# EAGLE board SparkFun_Pressure_Sensor_BMP581_Qwiic-Panel (EAGLE 9.6.2), part 1 of 3
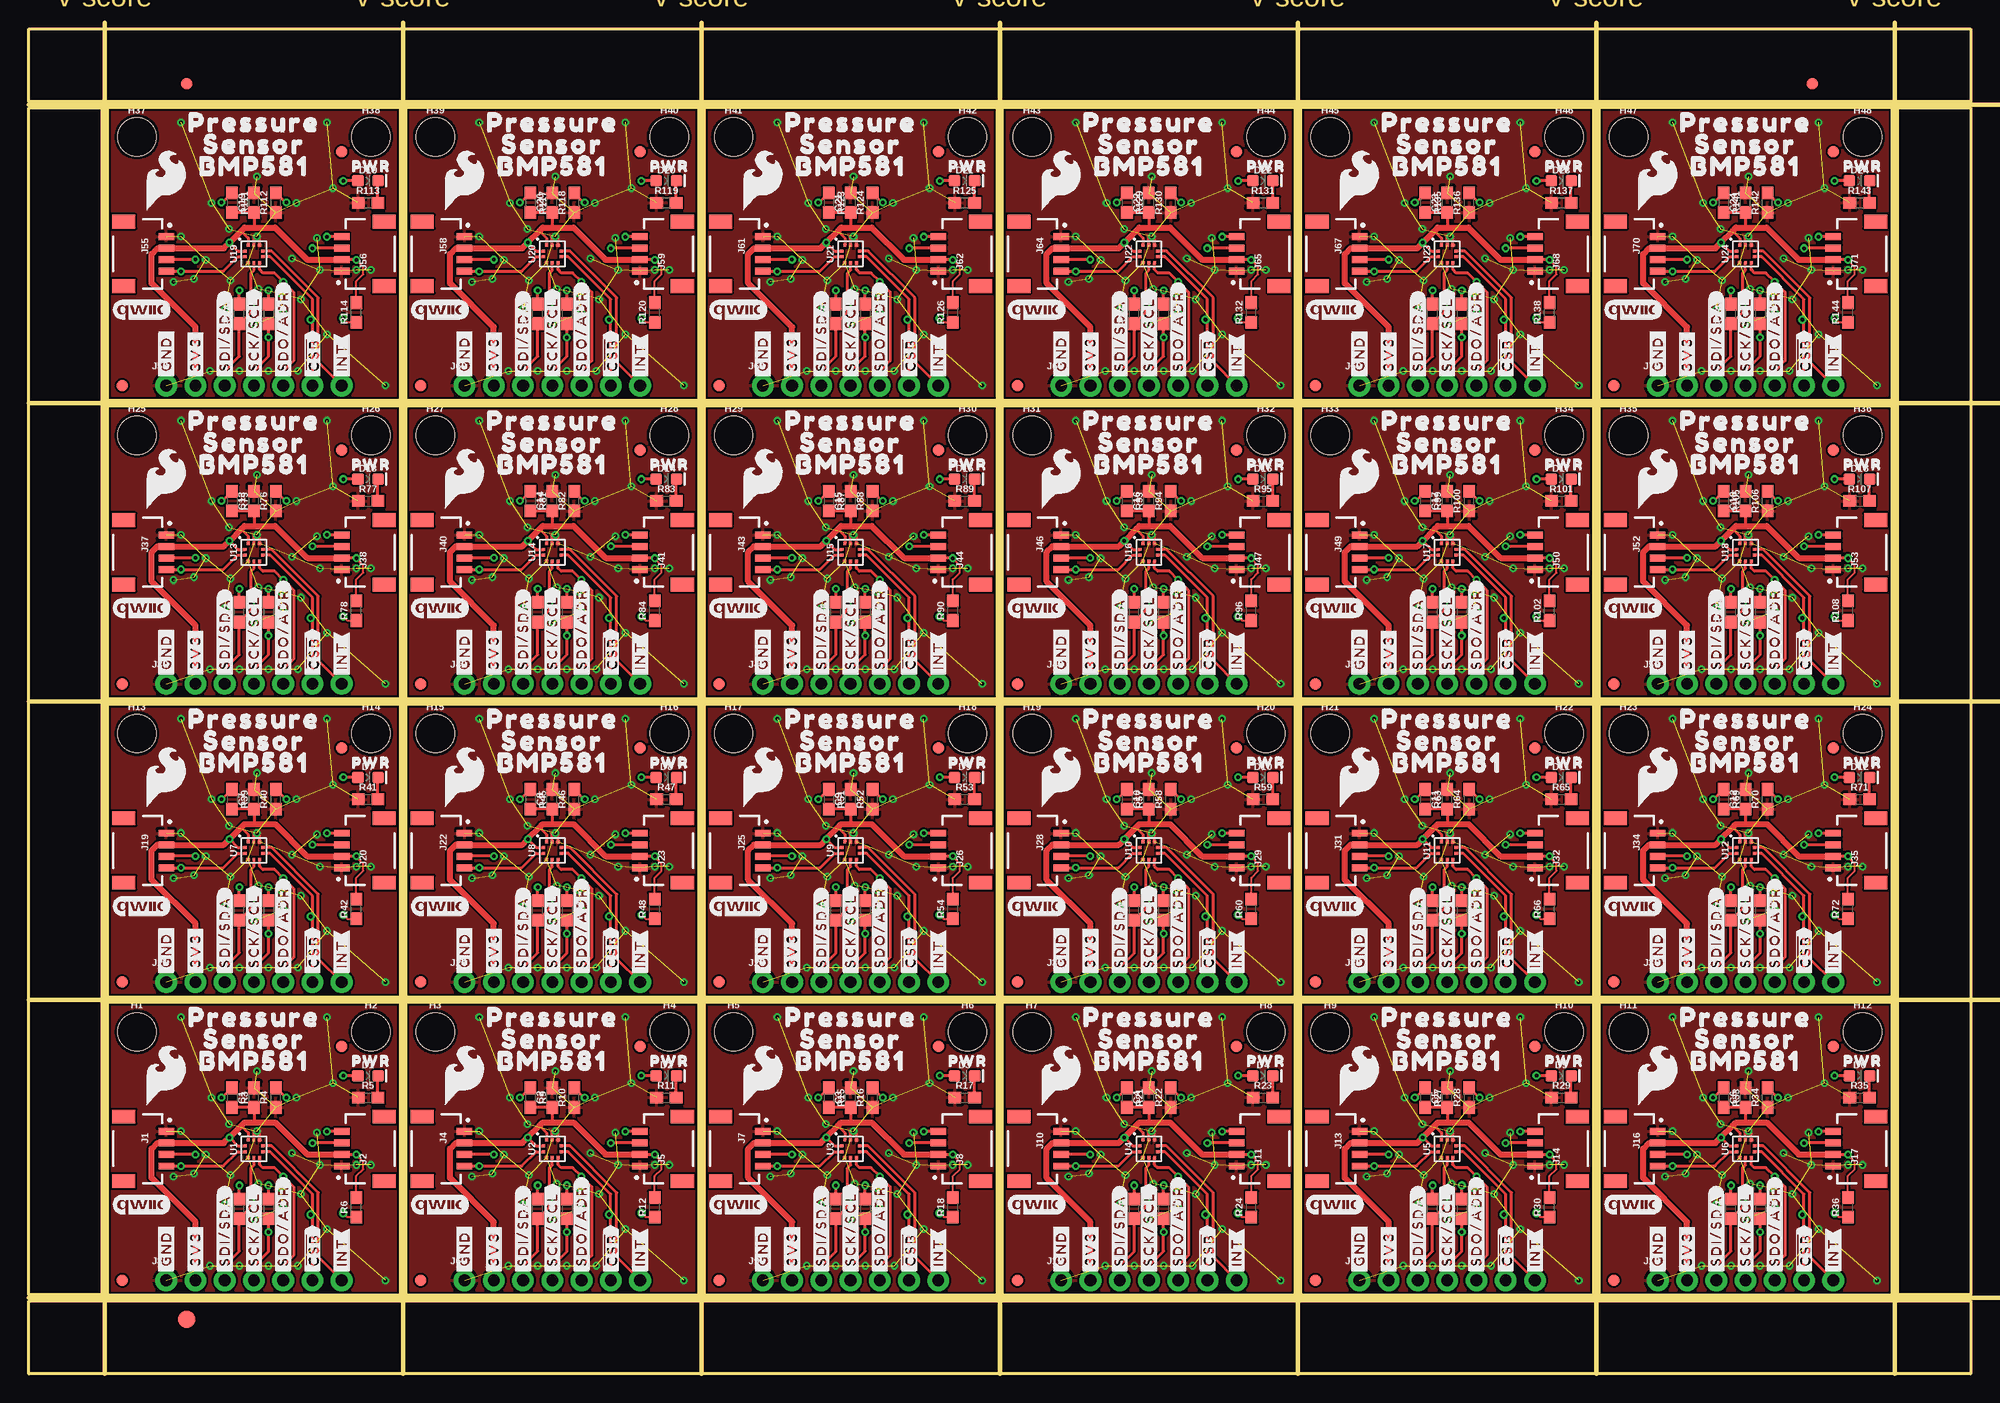
[diagram p0: board, top side]
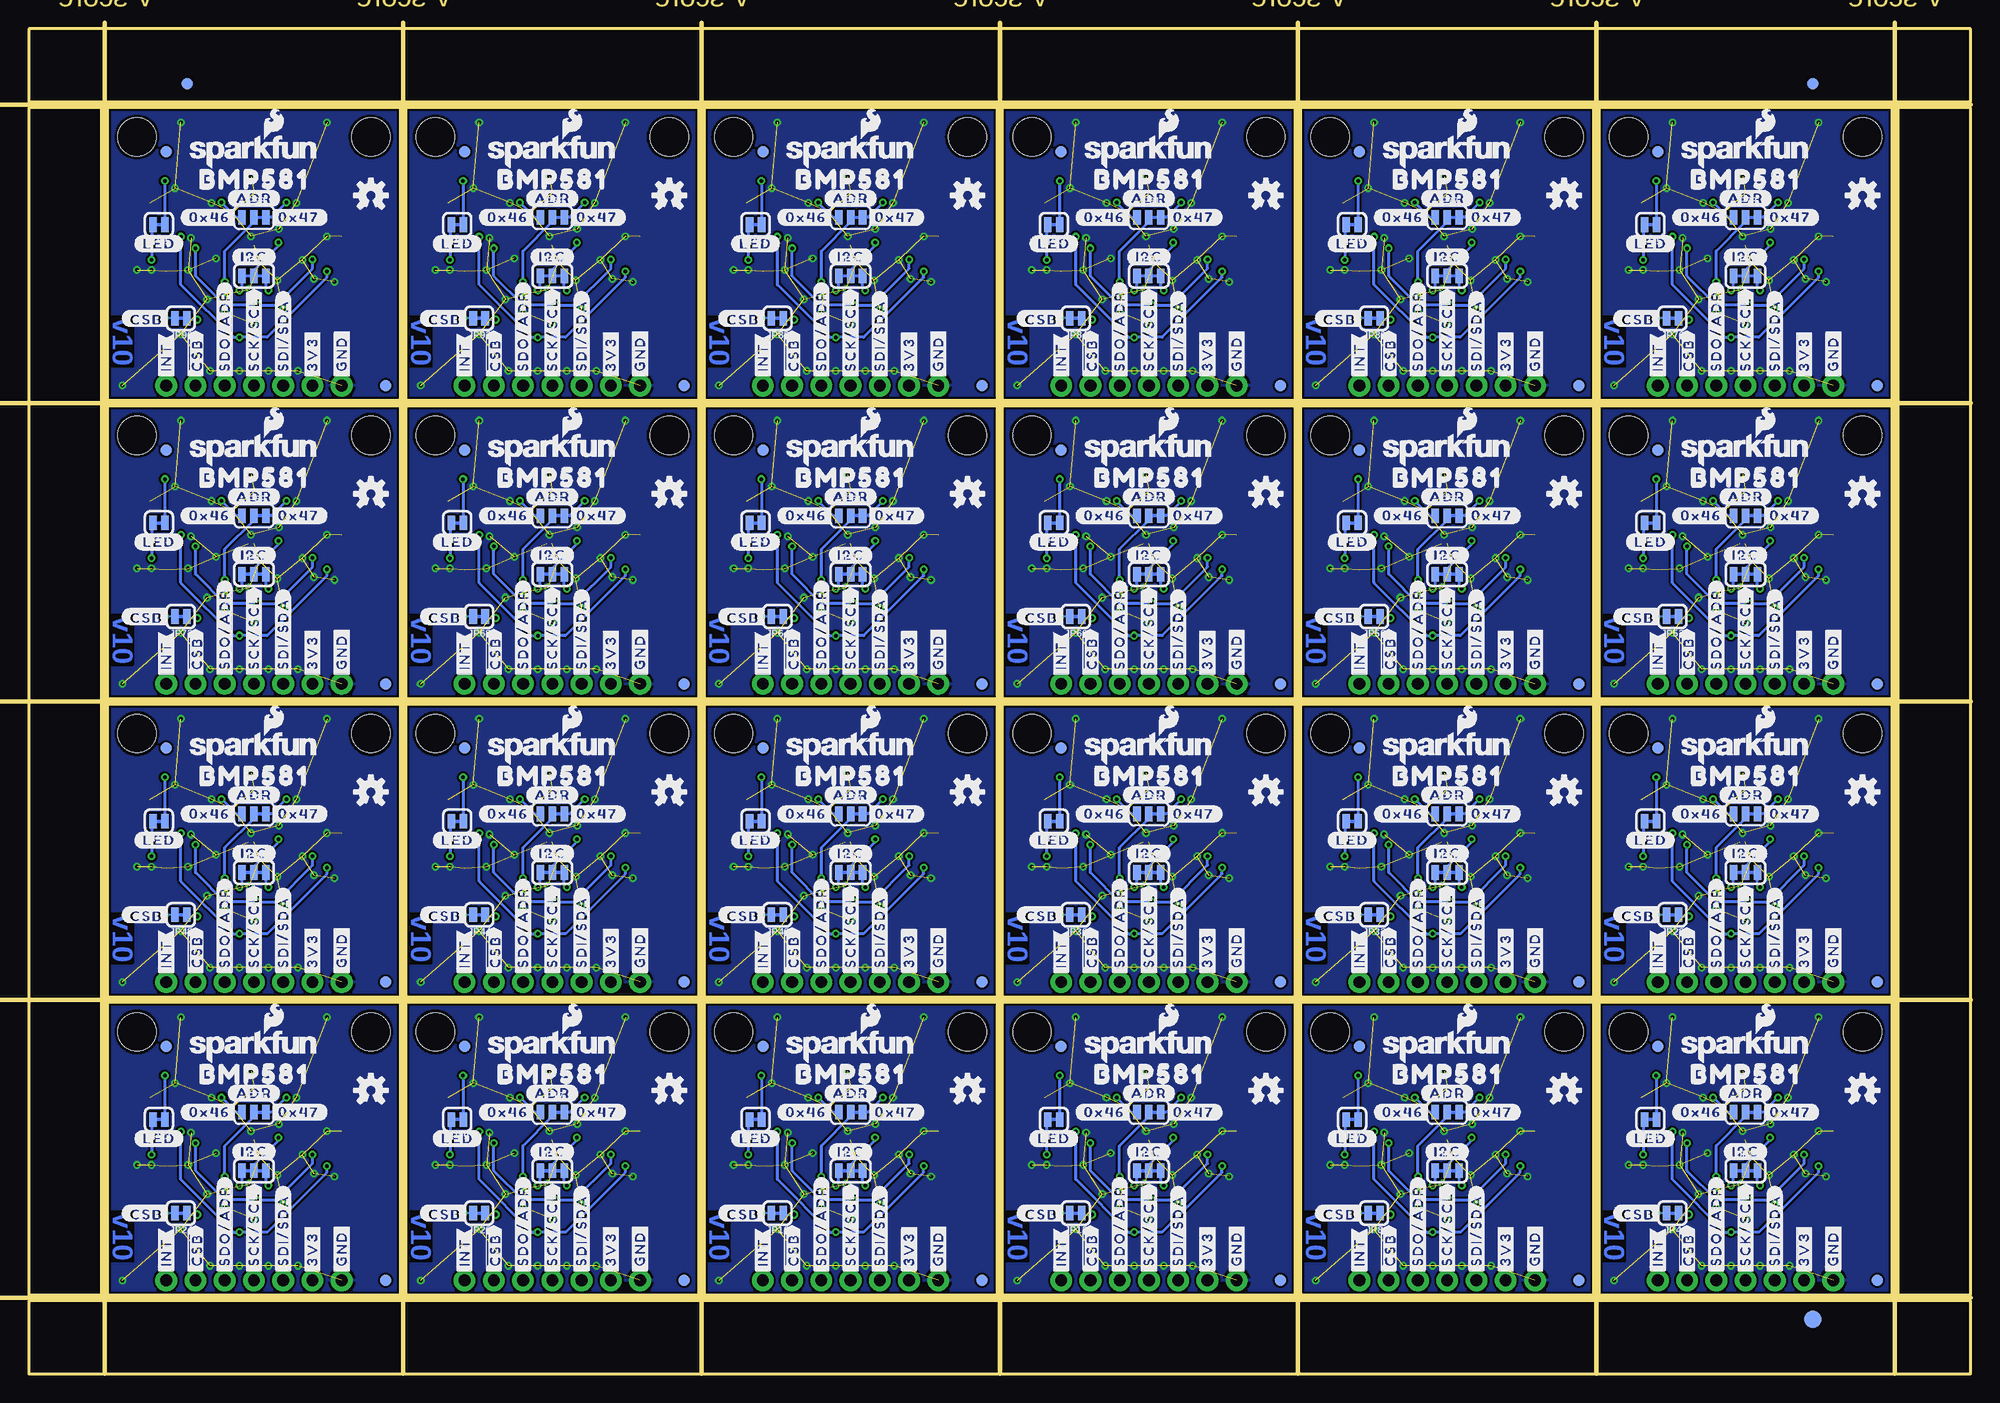
[diagram p1: board, bottom side, seen from below]

Size 168.66 x 116.84 mm. Coordinates in mm from the lower left corner, seen from the top.
Outline: 112 segments
Copper layers (1*16): Top 0.035mm / dielectric 1.5mm / Bottom 0.035mm
Design rules "SparkFun_Pressure_Sensor_BMP581_Qwiic": minimum track width 7mil, minimum drill 0.3mm, track to track 7mil, track to pad 7mil, pad to pad 7mil, via to via 7mil, smd to smd 7mil, copper to edge 7mil, drill to drill 7mil, minimum pad ring 7mil, minimum via ring 7mil, stop-mask expansion 3mil, vias tented up to drill 25mil, thermal gap 10mil
tRestrict: area 18.7,18.7 to 18.8,18.9; area 20.3,20.2 to 20.4,20.4; area 19.7,20.2 to 19.8,20.4; area 44.6,18.7 to 44.7,18.9; area 46.2,20.2 to 46.4,20.4; area 45.6,20.2 to 45.7,20.4; area 70.5,18.7 to 70.6,18.9; area 72.1,20.2 to 72.3,20.4; area 71.5,20.2 to 71.6,20.4; area 96.4,18.7 to 96.5,18.9; area 98,20.2 to 98.2,20.4; area 97.4,20.2 to 97.5,20.4; 60 more areas
Milling: 12 lines

## Footprints (pad centres in the part's own frame; a part is rotated, then mirrored left to right if it is on the bottom)
0603 = smd 1.1 x 1: 1 -0.85,0; 2 0.85,0
LED-0603 = smd 1 x 1: A -0.877,0; C 0.877,0
FIDUCIAL-1X2 = smd 1 x 1: 1 0,0
FIDUCIAL-1.5X3 = smd 1.5 x 1.5: 1 0,0
STAND-OFF = hole 3.302: 0,0
JST04_1MM_RA = smd 0.6 x 1.35: 1 -1.5,0; 2 -0.5,0; 3 0.5,0; 4 1.5,0 | smd 1.2 x 2: NC1 2.8,-3.675; NC2 -2.8,-3.675
1X07_NO_SILK = drill 1.016 pad 1.88: 1 0,0; 2 2.54,0; 3 5.08,0; 4 7.62,0; 5 10.16,0; 6 12.7,0; 7 15.24,0
SMT-JUMPER_3_1-NC_TRACE_SILK = smd 0.66 x 1.27: 1 -1.041,0; 2 0,0; 3 1.041,0
SMT-JUMPER_3_2-NC_TRACE_SILK = smd 0.66 x 1.27: 1 -1.041,0; 2 0,0; 3 1.041,0
SMT-JUMPER_2_NC_TRACE_SILK = smd 0.66 x 1.27: 1 -0.521,0; 2 0.521,0
BMP581 = smd 0.25 x 0.275: 1 0.25,0.762; 2 -0.25,0.762; 6 -0.25,-0.762; 7 0.25,-0.762 | smd 0.275 x 0.25: 3 -0.762,0.5; 4 -0.762,0; 5 -0.762,-0.5; 8 0.762,-0.5; 9 0.762,0; 10 0.762,0.5

## Placement (x,y rotation side)
C1  0.1uF  [0603]  19.56,24 90 top
C2  0.1uF  [0603]  45.47,24 90 top
C3  0.1uF  [0603]  71.37,24 90 top
C4  0.1uF  [0603]  97.28,24 90 top
C5  0.1uF  [0603]  123.19,24 90 top
C6  0.1uF  [0603]  149.1,24 90 top
C7  0.1uF  [0603]  19.56,49.91 90 top
C8  0.1uF  [0603]  45.47,49.91 90 top
C9  0.1uF  [0603]  71.37,49.91 90 top
C10  0.1uF  [0603]  97.28,49.91 90 top
C11  0.1uF  [0603]  123.19,49.91 90 top
C12  0.1uF  [0603]  149.1,49.91 90 top
C13  0.1uF  [0603]  19.56,75.82 90 top
C14  0.1uF  [0603]  45.47,75.82 90 top
C15  0.1uF  [0603]  71.37,75.82 90 top
C16  0.1uF  [0603]  97.28,75.82 90 top
C17  0.1uF  [0603]  123.19,75.82 90 top
C18  0.1uF  [0603]  149.1,75.82 90 top
C19  0.1uF  [0603]  19.56,101.73 90 top
C20  0.1uF  [0603]  45.47,101.73 90 top
C21  0.1uF  [0603]  71.37,101.73 90 top
C22  0.1uF  [0603]  97.28,101.73 90 top
C23  0.1uF  [0603]  123.19,101.73 90 top
C24  0.1uF  [0603]  149.1,101.73 90 top
D1  RED  [LED-0603]  29.46,25.91 0 top
D2  RED  [LED-0603]  55.37,25.91 0 top
D3  RED  [LED-0603]  81.28,25.91 0 top
D4  RED  [LED-0603]  107.19,25.91 0 top
D5  RED  [LED-0603]  133.1,25.91 0 top
D6  RED  [LED-0603]  159,25.91 0 top
D7  RED  [LED-0603]  29.46,51.82 0 top
D8  RED  [LED-0603]  55.37,51.82 0 top
D9  RED  [LED-0603]  81.28,51.82 0 top
D10  RED  [LED-0603]  107.19,51.82 0 top
D11  RED  [LED-0603]  133.1,51.82 0 top
D12  RED  [LED-0603]  159,51.82 0 top
D13  RED  [LED-0603]  29.46,77.72 0 top
D14  RED  [LED-0603]  55.37,77.72 0 top
D15  RED  [LED-0603]  81.28,77.72 0 top
D16  RED  [LED-0603]  107.19,77.72 0 top
D17  RED  [LED-0603]  133.1,77.72 0 top
D18  RED  [LED-0603]  159,77.72 0 top
D19  RED  [LED-0603]  29.46,103.63 0 top
D20  RED  [LED-0603]  55.37,103.63 0 top
D21  RED  [LED-0603]  81.28,103.63 0 top
D22  RED  [LED-0603]  107.19,103.63 0 top
D23  RED  [LED-0603]  133.1,103.63 0 top
D24  RED  [LED-0603]  159,103.63 0 top
E$1  [FIDUCIAL-1X2]  13.72,112.08 0 top
E$2  [FIDUCIAL-1X2]  13.72,112.08 0 bottom
E$3  [FIDUCIAL-1X2]  154.88,112.08 0 top
E$4  [FIDUCIAL-1X2]  154.88,112.08 0 bottom
E$5  [FIDUCIAL-1.5X3]  13.72,4.76 0 top
E$6  [FIDUCIAL-1.5X3]  13.72,4.76 0 bottom
FD1  FIDUCIAL1X2  [FIDUCIAL-1X2]  27.18,28.45 0 bottom
FD2  FIDUCIAL1X2  [FIDUCIAL-1X2]  27.18,28.45 0 top
FD3  FIDUCIAL1X2  [FIDUCIAL-1X2]  8.13,8.13 0 bottom
FD4  FIDUCIAL1X2  [FIDUCIAL-1X2]  8.13,8.13 0 top
FD5  FIDUCIAL1X2  [FIDUCIAL-1X2]  53.09,28.45 0 bottom
FD6  FIDUCIAL1X2  [FIDUCIAL-1X2]  53.09,28.45 0 top
FD7  FIDUCIAL1X2  [FIDUCIAL-1X2]  34.04,8.13 0 bottom
FD8  FIDUCIAL1X2  [FIDUCIAL-1X2]  34.04,8.13 0 top
FD9  FIDUCIAL1X2  [FIDUCIAL-1X2]  78.99,28.45 0 bottom
FD10  FIDUCIAL1X2  [FIDUCIAL-1X2]  78.99,28.45 0 top
FD11  FIDUCIAL1X2  [FIDUCIAL-1X2]  59.94,8.13 0 bottom
FD12  FIDUCIAL1X2  [FIDUCIAL-1X2]  59.94,8.13 0 top
FD13  FIDUCIAL1X2  [FIDUCIAL-1X2]  104.9,28.45 0 bottom
FD14  FIDUCIAL1X2  [FIDUCIAL-1X2]  104.9,28.45 0 top
FD15  FIDUCIAL1X2  [FIDUCIAL-1X2]  85.85,8.13 0 bottom
FD16  FIDUCIAL1X2  [FIDUCIAL-1X2]  85.85,8.13 0 top
FD17  FIDUCIAL1X2  [FIDUCIAL-1X2]  130.81,28.45 0 bottom
FD18  FIDUCIAL1X2  [FIDUCIAL-1X2]  130.81,28.45 0 top
FD19  FIDUCIAL1X2  [FIDUCIAL-1X2]  111.76,8.13 0 bottom
FD20  FIDUCIAL1X2  [FIDUCIAL-1X2]  111.76,8.13 0 top
FD21  FIDUCIAL1X2  [FIDUCIAL-1X2]  156.72,28.45 0 bottom
FD22  FIDUCIAL1X2  [FIDUCIAL-1X2]  156.72,28.45 0 top
FD23  FIDUCIAL1X2  [FIDUCIAL-1X2]  137.67,8.13 0 bottom
FD24  FIDUCIAL1X2  [FIDUCIAL-1X2]  137.67,8.13 0 top
FD25  FIDUCIAL1X2  [FIDUCIAL-1X2]  27.18,54.36 0 bottom
FD26  FIDUCIAL1X2  [FIDUCIAL-1X2]  27.18,54.36 0 top
FD27  FIDUCIAL1X2  [FIDUCIAL-1X2]  8.13,34.04 0 bottom
FD28  FIDUCIAL1X2  [FIDUCIAL-1X2]  8.13,34.04 0 top
FD29  FIDUCIAL1X2  [FIDUCIAL-1X2]  53.09,54.36 0 bottom
FD30  FIDUCIAL1X2  [FIDUCIAL-1X2]  53.09,54.36 0 top
FD31  FIDUCIAL1X2  [FIDUCIAL-1X2]  34.04,34.04 0 bottom
FD32  FIDUCIAL1X2  [FIDUCIAL-1X2]  34.04,34.04 0 top
FD33  FIDUCIAL1X2  [FIDUCIAL-1X2]  78.99,54.36 0 bottom
FD34  FIDUCIAL1X2  [FIDUCIAL-1X2]  78.99,54.36 0 top
FD35  FIDUCIAL1X2  [FIDUCIAL-1X2]  59.94,34.04 0 bottom
FD36  FIDUCIAL1X2  [FIDUCIAL-1X2]  59.94,34.04 0 top
FD37  FIDUCIAL1X2  [FIDUCIAL-1X2]  104.9,54.36 0 bottom
FD38  FIDUCIAL1X2  [FIDUCIAL-1X2]  104.9,54.36 0 top
FD39  FIDUCIAL1X2  [FIDUCIAL-1X2]  85.85,34.04 0 bottom
FD40  FIDUCIAL1X2  [FIDUCIAL-1X2]  85.85,34.04 0 top
FD41  FIDUCIAL1X2  [FIDUCIAL-1X2]  130.81,54.36 0 bottom
FD42  FIDUCIAL1X2  [FIDUCIAL-1X2]  130.81,54.36 0 top
FD43  FIDUCIAL1X2  [FIDUCIAL-1X2]  111.76,34.04 0 bottom
FD44  FIDUCIAL1X2  [FIDUCIAL-1X2]  111.76,34.04 0 top
FD45  FIDUCIAL1X2  [FIDUCIAL-1X2]  156.72,54.36 0 bottom
FD46  FIDUCIAL1X2  [FIDUCIAL-1X2]  156.72,54.36 0 top
FD47  FIDUCIAL1X2  [FIDUCIAL-1X2]  137.67,34.04 0 bottom
FD48  FIDUCIAL1X2  [FIDUCIAL-1X2]  137.67,34.04 0 top
FD49  FIDUCIAL1X2  [FIDUCIAL-1X2]  27.18,80.26 0 bottom
FD50  FIDUCIAL1X2  [FIDUCIAL-1X2]  27.18,80.26 0 top
FD51  FIDUCIAL1X2  [FIDUCIAL-1X2]  8.13,59.94 0 bottom
FD52  FIDUCIAL1X2  [FIDUCIAL-1X2]  8.13,59.94 0 top
FD53  FIDUCIAL1X2  [FIDUCIAL-1X2]  53.09,80.26 0 bottom
FD54  FIDUCIAL1X2  [FIDUCIAL-1X2]  53.09,80.26 0 top
FD55  FIDUCIAL1X2  [FIDUCIAL-1X2]  34.04,59.94 0 bottom
FD56  FIDUCIAL1X2  [FIDUCIAL-1X2]  34.04,59.94 0 top
FD57  FIDUCIAL1X2  [FIDUCIAL-1X2]  78.99,80.26 0 bottom
FD58  FIDUCIAL1X2  [FIDUCIAL-1X2]  78.99,80.26 0 top
FD59  FIDUCIAL1X2  [FIDUCIAL-1X2]  59.94,59.94 0 bottom
FD60  FIDUCIAL1X2  [FIDUCIAL-1X2]  59.94,59.94 0 top
FD61  FIDUCIAL1X2  [FIDUCIAL-1X2]  104.9,80.26 0 bottom
FD62  FIDUCIAL1X2  [FIDUCIAL-1X2]  104.9,80.26 0 top
FD63  FIDUCIAL1X2  [FIDUCIAL-1X2]  85.85,59.94 0 bottom
FD64  FIDUCIAL1X2  [FIDUCIAL-1X2]  85.85,59.94 0 top
FD65  FIDUCIAL1X2  [FIDUCIAL-1X2]  130.81,80.26 0 bottom
FD66  FIDUCIAL1X2  [FIDUCIAL-1X2]  130.81,80.26 0 top
FD67  FIDUCIAL1X2  [FIDUCIAL-1X2]  111.76,59.94 0 bottom
FD68  FIDUCIAL1X2  [FIDUCIAL-1X2]  111.76,59.94 0 top
FD69  FIDUCIAL1X2  [FIDUCIAL-1X2]  156.72,80.26 0 bottom
FD70  FIDUCIAL1X2  [FIDUCIAL-1X2]  156.72,80.26 0 top
FD71  FIDUCIAL1X2  [FIDUCIAL-1X2]  137.67,59.94 0 bottom
FD72  FIDUCIAL1X2  [FIDUCIAL-1X2]  137.67,59.94 0 top
FD73  FIDUCIAL1X2  [FIDUCIAL-1X2]  27.18,106.17 0 bottom
FD74  FIDUCIAL1X2  [FIDUCIAL-1X2]  27.18,106.17 0 top
FD75  FIDUCIAL1X2  [FIDUCIAL-1X2]  8.13,85.85 0 bottom
FD76  FIDUCIAL1X2  [FIDUCIAL-1X2]  8.13,85.85 0 top
FD77  FIDUCIAL1X2  [FIDUCIAL-1X2]  53.09,106.17 0 bottom
FD78  FIDUCIAL1X2  [FIDUCIAL-1X2]  53.09,106.17 0 top
FD79  FIDUCIAL1X2  [FIDUCIAL-1X2]  34.04,85.85 0 bottom
FD80  FIDUCIAL1X2  [FIDUCIAL-1X2]  34.04,85.85 0 top
FD81  FIDUCIAL1X2  [FIDUCIAL-1X2]  78.99,106.17 0 bottom
FD82  FIDUCIAL1X2  [FIDUCIAL-1X2]  78.99,106.17 0 top
FD83  FIDUCIAL1X2  [FIDUCIAL-1X2]  59.94,85.85 0 bottom
FD84  FIDUCIAL1X2  [FIDUCIAL-1X2]  59.94,85.85 0 top
FD85  FIDUCIAL1X2  [FIDUCIAL-1X2]  104.9,106.17 0 bottom
FD86  FIDUCIAL1X2  [FIDUCIAL-1X2]  104.9,106.17 0 top
FD87  FIDUCIAL1X2  [FIDUCIAL-1X2]  85.85,85.85 0 bottom
FD88  FIDUCIAL1X2  [FIDUCIAL-1X2]  85.85,85.85 0 top
FD89  FIDUCIAL1X2  [FIDUCIAL-1X2]  130.81,106.17 0 bottom
FD90  FIDUCIAL1X2  [FIDUCIAL-1X2]  130.81,106.17 0 top
FD91  FIDUCIAL1X2  [FIDUCIAL-1X2]  111.76,85.85 0 bottom
FD92  FIDUCIAL1X2  [FIDUCIAL-1X2]  111.76,85.85 0 top
FD93  FIDUCIAL1X2  [FIDUCIAL-1X2]  156.72,106.17 0 bottom
FD94  FIDUCIAL1X2  [FIDUCIAL-1X2]  156.72,106.17 0 top
FD95  FIDUCIAL1X2  [FIDUCIAL-1X2]  137.67,85.85 0 bottom
FD96  FIDUCIAL1X2  [FIDUCIAL-1X2]  137.67,85.85 0 top
H1  STAND-OFF  [STAND-OFF]  9.4,29.72 0 top
H2  STAND-OFF  [STAND-OFF]  29.72,29.72 0 top
H3  STAND-OFF  [STAND-OFF]  35.31,29.72 0 top
H4  STAND-OFF  [STAND-OFF]  55.63,29.72 0 top
H5  STAND-OFF  [STAND-OFF]  61.21,29.72 0 top
H6  STAND-OFF  [STAND-OFF]  81.53,29.72 0 top
H7  STAND-OFF  [STAND-OFF]  87.12,29.72 0 top
H8  STAND-OFF  [STAND-OFF]  107.44,29.72 0 top
H9  STAND-OFF  [STAND-OFF]  113.03,29.72 0 top
H10  STAND-OFF  [STAND-OFF]  133.35,29.72 0 top
H11  STAND-OFF  [STAND-OFF]  138.94,29.72 0 top
H12  STAND-OFF  [STAND-OFF]  159.26,29.72 0 top
H13  STAND-OFF  [STAND-OFF]  9.4,55.63 0 top
H14  STAND-OFF  [STAND-OFF]  29.72,55.63 0 top
H15  STAND-OFF  [STAND-OFF]  35.31,55.63 0 top
H16  STAND-OFF  [STAND-OFF]  55.63,55.63 0 top
H17  STAND-OFF  [STAND-OFF]  61.21,55.63 0 top
H18  STAND-OFF  [STAND-OFF]  81.53,55.63 0 top
H19  STAND-OFF  [STAND-OFF]  87.12,55.63 0 top
H20  STAND-OFF  [STAND-OFF]  107.44,55.63 0 top
H21  STAND-OFF  [STAND-OFF]  113.03,55.63 0 top
H22  STAND-OFF  [STAND-OFF]  133.35,55.63 0 top
H23  STAND-OFF  [STAND-OFF]  138.94,55.63 0 top
H24  STAND-OFF  [STAND-OFF]  159.26,55.63 0 top
H25  STAND-OFF  [STAND-OFF]  9.4,81.53 0 top
H26  STAND-OFF  [STAND-OFF]  29.72,81.53 0 top
H27  STAND-OFF  [STAND-OFF]  35.31,81.53 0 top
H28  STAND-OFF  [STAND-OFF]  55.63,81.53 0 top
H29  STAND-OFF  [STAND-OFF]  61.21,81.53 0 top
H30  STAND-OFF  [STAND-OFF]  81.53,81.53 0 top
H31  STAND-OFF  [STAND-OFF]  87.12,81.53 0 top
H32  STAND-OFF  [STAND-OFF]  107.44,81.53 0 top
H33  STAND-OFF  [STAND-OFF]  113.03,81.53 0 top
H34  STAND-OFF  [STAND-OFF]  133.35,81.53 0 top
H35  STAND-OFF  [STAND-OFF]  138.94,81.53 0 top
H36  STAND-OFF  [STAND-OFF]  159.26,81.53 0 top
H37  STAND-OFF  [STAND-OFF]  9.4,107.44 0 top
H38  STAND-OFF  [STAND-OFF]  29.72,107.44 0 top
H39  STAND-OFF  [STAND-OFF]  35.31,107.44 0 top
H40  STAND-OFF  [STAND-OFF]  55.63,107.44 0 top
H41  STAND-OFF  [STAND-OFF]  61.21,107.44 0 top
H42  STAND-OFF  [STAND-OFF]  81.53,107.44 0 top
H43  STAND-OFF  [STAND-OFF]  87.12,107.44 0 top
H44  STAND-OFF  [STAND-OFF]  107.44,107.44 0 top
H45  STAND-OFF  [STAND-OFF]  113.03,107.44 0 top
H46  STAND-OFF  [STAND-OFF]  133.35,107.44 0 top
H47  STAND-OFF  [STAND-OFF]  138.94,107.44 0 top
H48  STAND-OFF  [STAND-OFF]  159.26,107.44 0 top
J1  QWIIC_RIGHT_ANGLE  [JST04_1MM_RA]  11.94,19.56 270 top
J2  QWIIC_RIGHT_ANGLE  [JST04_1MM_RA]  27.18,19.56 90 top
J3  [1X07_NO_SILK]  11.94,8.13 0 top
J4  QWIIC_RIGHT_ANGLE  [JST04_1MM_RA]  37.85,19.56 270 top
J5  QWIIC_RIGHT_ANGLE  [JST04_1MM_RA]  53.09,19.56 90 top
J6  [1X07_NO_SILK]  37.85,8.13 0 top
J7  QWIIC_RIGHT_ANGLE  [JST04_1MM_RA]  63.75,19.56 270 top
J8  QWIIC_RIGHT_ANGLE  [JST04_1MM_RA]  78.99,19.56 90 top
J9  [1X07_NO_SILK]  63.75,8.13 0 top
J10  QWIIC_RIGHT_ANGLE  [JST04_1MM_RA]  89.66,19.56 270 top
J11  QWIIC_RIGHT_ANGLE  [JST04_1MM_RA]  104.9,19.56 90 top
J12  [1X07_NO_SILK]  89.66,8.13 0 top
J13  QWIIC_RIGHT_ANGLE  [JST04_1MM_RA]  115.57,19.56 270 top
J14  QWIIC_RIGHT_ANGLE  [JST04_1MM_RA]  130.81,19.56 90 top
J15  [1X07_NO_SILK]  115.57,8.13 0 top
J16  QWIIC_RIGHT_ANGLE  [JST04_1MM_RA]  141.48,19.56 270 top
J17  QWIIC_RIGHT_ANGLE  [JST04_1MM_RA]  156.72,19.56 90 top
J18  [1X07_NO_SILK]  141.48,8.13 0 top
J19  QWIIC_RIGHT_ANGLE  [JST04_1MM_RA]  11.94,45.47 270 top
J20  QWIIC_RIGHT_ANGLE  [JST04_1MM_RA]  27.18,45.47 90 top
J21  [1X07_NO_SILK]  11.94,34.04 0 top
J22  QWIIC_RIGHT_ANGLE  [JST04_1MM_RA]  37.85,45.47 270 top
J23  QWIIC_RIGHT_ANGLE  [JST04_1MM_RA]  53.09,45.47 90 top
J24  [1X07_NO_SILK]  37.85,34.04 0 top
J25  QWIIC_RIGHT_ANGLE  [JST04_1MM_RA]  63.75,45.47 270 top
J26  QWIIC_RIGHT_ANGLE  [JST04_1MM_RA]  78.99,45.47 90 top
J27  [1X07_NO_SILK]  63.75,34.04 0 top
J28  QWIIC_RIGHT_ANGLE  [JST04_1MM_RA]  89.66,45.47 270 top
J29  QWIIC_RIGHT_ANGLE  [JST04_1MM_RA]  104.9,45.47 90 top
J30  [1X07_NO_SILK]  89.66,34.04 0 top
J31  QWIIC_RIGHT_ANGLE  [JST04_1MM_RA]  115.57,45.47 270 top
J32  QWIIC_RIGHT_ANGLE  [JST04_1MM_RA]  130.81,45.47 90 top
J33  [1X07_NO_SILK]  115.57,34.04 0 top
J34  QWIIC_RIGHT_ANGLE  [JST04_1MM_RA]  141.48,45.47 270 top
J35  QWIIC_RIGHT_ANGLE  [JST04_1MM_RA]  156.72,45.47 90 top
J36  [1X07_NO_SILK]  141.48,34.04 0 top
J37  QWIIC_RIGHT_ANGLE  [JST04_1MM_RA]  11.94,71.37 270 top
J38  QWIIC_RIGHT_ANGLE  [JST04_1MM_RA]  27.18,71.37 90 top
J39  [1X07_NO_SILK]  11.94,59.94 0 top
J40  QWIIC_RIGHT_ANGLE  [JST04_1MM_RA]  37.85,71.37 270 top
J41  QWIIC_RIGHT_ANGLE  [JST04_1MM_RA]  53.09,71.37 90 top
J42  [1X07_NO_SILK]  37.85,59.94 0 top
J43  QWIIC_RIGHT_ANGLE  [JST04_1MM_RA]  63.75,71.37 270 top
J44  QWIIC_RIGHT_ANGLE  [JST04_1MM_RA]  78.99,71.37 90 top
J45  [1X07_NO_SILK]  63.75,59.94 0 top
J46  QWIIC_RIGHT_ANGLE  [JST04_1MM_RA]  89.66,71.37 270 top
J47  QWIIC_RIGHT_ANGLE  [JST04_1MM_RA]  104.9,71.37 90 top
J48  [1X07_NO_SILK]  89.66,59.94 0 top
J49  QWIIC_RIGHT_ANGLE  [JST04_1MM_RA]  115.57,71.37 270 top
J50  QWIIC_RIGHT_ANGLE  [JST04_1MM_RA]  130.81,71.37 90 top
J51  [1X07_NO_SILK]  115.57,59.94 0 top
J52  QWIIC_RIGHT_ANGLE  [JST04_1MM_RA]  141.48,71.37 270 top
J53  QWIIC_RIGHT_ANGLE  [JST04_1MM_RA]  156.72,71.37 90 top
J54  [1X07_NO_SILK]  141.48,59.94 0 top
J55  QWIIC_RIGHT_ANGLE  [JST04_1MM_RA]  11.94,97.28 270 top
J56  QWIIC_RIGHT_ANGLE  [JST04_1MM_RA]  27.18,97.28 90 top
J57  [1X07_NO_SILK]  11.94,85.85 0 top
J58  QWIIC_RIGHT_ANGLE  [JST04_1MM_RA]  37.85,97.28 270 top
J59  QWIIC_RIGHT_ANGLE  [JST04_1MM_RA]  53.09,97.28 90 top
J60  [1X07_NO_SILK]  37.85,85.85 0 top
J61  QWIIC_RIGHT_ANGLE  [JST04_1MM_RA]  63.75,97.28 270 top
J62  QWIIC_RIGHT_ANGLE  [JST04_1MM_RA]  78.99,97.28 90 top
J63  [1X07_NO_SILK]  63.75,85.85 0 top
J64  QWIIC_RIGHT_ANGLE  [JST04_1MM_RA]  89.66,97.28 270 top
J65  QWIIC_RIGHT_ANGLE  [JST04_1MM_RA]  104.9,97.28 90 top
J66  [1X07_NO_SILK]  89.66,85.85 0 top
J67  QWIIC_RIGHT_ANGLE  [JST04_1MM_RA]  115.57,97.28 270 top
J68  QWIIC_RIGHT_ANGLE  [JST04_1MM_RA]  130.81,97.28 90 top
J69  [1X07_NO_SILK]  115.57,85.85 0 top
J70  QWIIC_RIGHT_ANGLE  [JST04_1MM_RA]  141.48,97.28 270 top
J71  QWIIC_RIGHT_ANGLE  [JST04_1MM_RA]  156.72,97.28 90 top
J72  [1X07_NO_SILK]  141.48,85.85 0 top
JP1  ADR  [SMT-JUMPER_3_1-NC_TRACE_SILK]  19.56,22.73 0 bottom
JP2  I2C  [SMT-JUMPER_3_2-NC_TRACE_SILK]  19.56,17.65 0 bottom
JP3  LED  [SMT-JUMPER_2_NC_TRACE_SILK]  27.81,22.1 180 bottom
JP4  !CSB!  [SMT-JUMPER_2_NC_TRACE_SILK]  25.91,13.97 180 bottom
JP5  ADR  [SMT-JUMPER_3_1-NC_TRACE_SILK]  45.47,22.73 0 bottom
JP6  I2C  [SMT-JUMPER_3_2-NC_TRACE_SILK]  45.47,17.65 0 bottom
JP7  LED  [SMT-JUMPER_2_NC_TRACE_SILK]  53.72,22.1 180 bottom
JP8  !CSB!  [SMT-JUMPER_2_NC_TRACE_SILK]  51.82,13.97 180 bottom
JP9  ADR  [SMT-JUMPER_3_1-NC_TRACE_SILK]  71.37,22.73 0 bottom
JP10  I2C  [SMT-JUMPER_3_2-NC_TRACE_SILK]  71.37,17.65 0 bottom
JP11  LED  [SMT-JUMPER_2_NC_TRACE_SILK]  79.63,22.1 180 bottom
JP12  !CSB!  [SMT-JUMPER_2_NC_TRACE_SILK]  77.72,13.97 180 bottom
JP13  ADR  [SMT-JUMPER_3_1-NC_TRACE_SILK]  97.28,22.73 0 bottom
JP14  I2C  [SMT-JUMPER_3_2-NC_TRACE_SILK]  97.28,17.65 0 bottom
JP15  LED  [SMT-JUMPER_2_NC_TRACE_SILK]  105.54,22.1 180 bottom
JP16  !CSB!  [SMT-JUMPER_2_NC_TRACE_SILK]  103.63,13.97 180 bottom
JP17  ADR  [SMT-JUMPER_3_1-NC_TRACE_SILK]  123.19,22.73 0 bottom
JP18  I2C  [SMT-JUMPER_3_2-NC_TRACE_SILK]  123.19,17.65 0 bottom
JP19  LED  [SMT-JUMPER_2_NC_TRACE_SILK]  131.44,22.1 180 bottom
JP20  !CSB!  [SMT-JUMPER_2_NC_TRACE_SILK]  129.54,13.97 180 bottom
JP21  ADR  [SMT-JUMPER_3_1-NC_TRACE_SILK]  149.1,22.73 0 bottom
JP22  I2C  [SMT-JUMPER_3_2-NC_TRACE_SILK]  149.1,17.65 0 bottom
JP23  LED  [SMT-JUMPER_2_NC_TRACE_SILK]  157.35,22.1 180 bottom
JP24  !CSB!  [SMT-JUMPER_2_NC_TRACE_SILK]  155.45,13.97 180 bottom
JP25  ADR  [SMT-JUMPER_3_1-NC_TRACE_SILK]  19.56,48.64 0 bottom
JP26  I2C  [SMT-JUMPER_3_2-NC_TRACE_SILK]  19.56,43.56 0 bottom
JP27  LED  [SMT-JUMPER_2_NC_TRACE_SILK]  27.81,48.01 180 bottom
JP28  !CSB!  [SMT-JUMPER_2_NC_TRACE_SILK]  25.91,39.88 180 bottom
JP29  ADR  [SMT-JUMPER_3_1-NC_TRACE_SILK]  45.47,48.64 0 bottom
JP30  I2C  [SMT-JUMPER_3_2-NC_TRACE_SILK]  45.47,43.56 0 bottom
JP31  LED  [SMT-JUMPER_2_NC_TRACE_SILK]  53.72,48.01 180 bottom
JP32  !CSB!  [SMT-JUMPER_2_NC_TRACE_SILK]  51.82,39.88 180 bottom
JP33  ADR  [SMT-JUMPER_3_1-NC_TRACE_SILK]  71.37,48.64 0 bottom
JP34  I2C  [SMT-JUMPER_3_2-NC_TRACE_SILK]  71.37,43.56 0 bottom
JP35  LED  [SMT-JUMPER_2_NC_TRACE_SILK]  79.63,48.01 180 bottom
JP36  !CSB!  [SMT-JUMPER_2_NC_TRACE_SILK]  77.72,39.88 180 bottom
JP37  ADR  [SMT-JUMPER_3_1-NC_TRACE_SILK]  97.28,48.64 0 bottom
JP38  I2C  [SMT-JUMPER_3_2-NC_TRACE_SILK]  97.28,43.56 0 bottom
JP39  LED  [SMT-JUMPER_2_NC_TRACE_SILK]  105.54,48.01 180 bottom
JP40  !CSB!  [SMT-JUMPER_2_NC_TRACE_SILK]  103.63,39.88 180 bottom
JP41  ADR  [SMT-JUMPER_3_1-NC_TRACE_SILK]  123.19,48.64 0 bottom
JP42  I2C  [SMT-JUMPER_3_2-NC_TRACE_SILK]  123.19,43.56 0 bottom
JP43  LED  [SMT-JUMPER_2_NC_TRACE_SILK]  131.44,48.01 180 bottom
JP44  !CSB!  [SMT-JUMPER_2_NC_TRACE_SILK]  129.54,39.88 180 bottom
JP45  ADR  [SMT-JUMPER_3_1-NC_TRACE_SILK]  149.1,48.64 0 bottom
JP46  I2C  [SMT-JUMPER_3_2-NC_TRACE_SILK]  149.1,43.56 0 bottom
JP47  LED  [SMT-JUMPER_2_NC_TRACE_SILK]  157.35,48.01 180 bottom
JP48  !CSB!  [SMT-JUMPER_2_NC_TRACE_SILK]  155.45,39.88 180 bottom
JP49  ADR  [SMT-JUMPER_3_1-NC_TRACE_SILK]  19.56,74.55 0 bottom
JP50  I2C  [SMT-JUMPER_3_2-NC_TRACE_SILK]  19.56,69.47 0 bottom
JP51  LED  [SMT-JUMPER_2_NC_TRACE_SILK]  27.81,73.91 180 bottom
JP52  !CSB!  [SMT-JUMPER_2_NC_TRACE_SILK]  25.91,65.79 180 bottom
JP53  ADR  [SMT-JUMPER_3_1-NC_TRACE_SILK]  45.47,74.55 0 bottom
JP54  I2C  [SMT-JUMPER_3_2-NC_TRACE_SILK]  45.47,69.47 0 bottom
JP55  LED  [SMT-JUMPER_2_NC_TRACE_SILK]  53.72,73.91 180 bottom
JP56  !CSB!  [SMT-JUMPER_2_NC_TRACE_SILK]  51.82,65.79 180 bottom
JP57  ADR  [SMT-JUMPER_3_1-NC_TRACE_SILK]  71.37,74.55 0 bottom
JP58  I2C  [SMT-JUMPER_3_2-NC_TRACE_SILK]  71.37,69.47 0 bottom
JP59  LED  [SMT-JUMPER_2_NC_TRACE_SILK]  79.63,73.91 180 bottom
JP60  !CSB!  [SMT-JUMPER_2_NC_TRACE_SILK]  77.72,65.79 180 bottom
JP61  ADR  [SMT-JUMPER_3_1-NC_TRACE_SILK]  97.28,74.55 0 bottom
JP62  I2C  [SMT-JUMPER_3_2-NC_TRACE_SILK]  97.28,69.47 0 bottom
JP63  LED  [SMT-JUMPER_2_NC_TRACE_SILK]  105.54,73.91 180 bottom
JP64  !CSB!  [SMT-JUMPER_2_NC_TRACE_SILK]  103.63,65.79 180 bottom
JP65  ADR  [SMT-JUMPER_3_1-NC_TRACE_SILK]  123.19,74.55 0 bottom
JP66  I2C  [SMT-JUMPER_3_2-NC_TRACE_SILK]  123.19,69.47 0 bottom
JP67  LED  [SMT-JUMPER_2_NC_TRACE_SILK]  131.44,73.91 180 bottom
JP68  !CSB!  [SMT-JUMPER_2_NC_TRACE_SILK]  129.54,65.79 180 bottom
JP69  ADR  [SMT-JUMPER_3_1-NC_TRACE_SILK]  149.1,74.55 0 bottom
JP70  I2C  [SMT-JUMPER_3_2-NC_TRACE_SILK]  149.1,69.47 0 bottom
JP71  LED  [SMT-JUMPER_2_NC_TRACE_SILK]  157.35,73.91 180 bottom
JP72  !CSB!  [SMT-JUMPER_2_NC_TRACE_SILK]  155.45,65.79 180 bottom
JP73  ADR  [SMT-JUMPER_3_1-NC_TRACE_SILK]  19.56,100.46 0 bottom
JP74  I2C  [SMT-JUMPER_3_2-NC_TRACE_SILK]  19.56,95.38 0 bottom
JP75  LED  [SMT-JUMPER_2_NC_TRACE_SILK]  27.81,99.82 180 bottom
JP76  !CSB!  [SMT-JUMPER_2_NC_TRACE_SILK]  25.91,91.69 180 bottom
JP77  ADR  [SMT-JUMPER_3_1-NC_TRACE_SILK]  45.47,100.46 0 bottom
JP78  I2C  [SMT-JUMPER_3_2-NC_TRACE_SILK]  45.47,95.38 0 bottom
JP79  LED  [SMT-JUMPER_2_NC_TRACE_SILK]  53.72,99.82 180 bottom
JP80  !CSB!  [SMT-JUMPER_2_NC_TRACE_SILK]  51.82,91.69 180 bottom
JP81  ADR  [SMT-JUMPER_3_1-NC_TRACE_SILK]  71.37,100.46 0 bottom
JP82  I2C  [SMT-JUMPER_3_2-NC_TRACE_SILK]  71.37,95.38 0 bottom
JP83  LED  [SMT-JUMPER_2_NC_TRACE_SILK]  79.63,99.82 180 bottom
JP84  !CSB!  [SMT-JUMPER_2_NC_TRACE_SILK]  77.72,91.69 180 bottom
JP85  ADR  [SMT-JUMPER_3_1-NC_TRACE_SILK]  97.28,100.46 0 bottom
JP86  I2C  [SMT-JUMPER_3_2-NC_TRACE_SILK]  97.28,95.38 0 bottom
JP87  LED  [SMT-JUMPER_2_NC_TRACE_SILK]  105.54,99.82 180 bottom
JP88  !CSB!  [SMT-JUMPER_2_NC_TRACE_SILK]  103.63,91.69 180 bottom
JP89  ADR  [SMT-JUMPER_3_1-NC_TRACE_SILK]  123.19,100.46 0 bottom
JP90  I2C  [SMT-JUMPER_3_2-NC_TRACE_SILK]  123.19,95.38 0 bottom
JP91  LED  [SMT-JUMPER_2_NC_TRACE_SILK]  131.44,99.82 180 bottom
JP92  !CSB!  [SMT-JUMPER_2_NC_TRACE_SILK]  129.54,91.69 180 bottom
JP93  ADR  [SMT-JUMPER_3_1-NC_TRACE_SILK]  149.1,100.46 0 bottom
JP94  I2C  [SMT-JUMPER_3_2-NC_TRACE_SILK]  149.1,95.38 0 bottom
JP95  LED  [SMT-JUMPER_2_NC_TRACE_SILK]  157.35,99.82 180 bottom
JP96  !CSB!  [SMT-JUMPER_2_NC_TRACE_SILK]  155.45,91.69 180 bottom
LOGO1  OSHW-LOGOS  [OSHW-LOGO-S]  9.4,24.64 0 bottom
LOGO2  SFE_LOGO_FLAME.2_INCH  [SFE_LOGO_FLAME_.2]  11.94,25.91 0 top
LOGO3  QWIIC_LOGO_5MM  [QWIIC_5MM]  9.78,14.73 0 top
LOGO4  SFE_LOGO_NAME_FLAME.1_INCH  [SFE_LOGO_NAME_FLAME_.1]  19.56,28.45 0 bottom
LOGO5  OSHW-LOGOS  [OSHW-LOGO-S]  35.31,24.64 0 bottom
LOGO6  SFE_LOGO_FLAME.2_INCH  [SFE_LOGO_FLAME_.2]  37.85,25.91 0 top
LOGO7  QWIIC_LOGO_5MM  [QWIIC_5MM]  35.69,14.73 0 top
LOGO8  SFE_LOGO_NAME_FLAME.1_INCH  [SFE_LOGO_NAME_FLAME_.1]  45.47,28.45 0 bottom
LOGO9  OSHW-LOGOS  [OSHW-LOGO-S]  61.21,24.64 0 bottom
LOGO10  SFE_LOGO_FLAME.2_INCH  [SFE_LOGO_FLAME_.2]  63.75,25.91 0 top
LOGO11  QWIIC_LOGO_5MM  [QWIIC_5MM]  61.59,14.73 0 top
LOGO12  SFE_LOGO_NAME_FLAME.1_INCH  [SFE_LOGO_NAME_FLAME_.1]  71.37,28.45 0 bottom
LOGO13  OSHW-LOGOS  [OSHW-LOGO-S]  87.12,24.64 0 bottom
LOGO14  SFE_LOGO_FLAME.2_INCH  [SFE_LOGO_FLAME_.2]  89.66,25.91 0 top
LOGO15  QWIIC_LOGO_5MM  [QWIIC_5MM]  87.5,14.73 0 top
LOGO16  SFE_LOGO_NAME_FLAME.1_INCH  [SFE_LOGO_NAME_FLAME_.1]  97.28,28.45 0 bottom
LOGO17  OSHW-LOGOS  [OSHW-LOGO-S]  113.03,24.64 0 bottom
LOGO18  SFE_LOGO_FLAME.2_INCH  [SFE_LOGO_FLAME_.2]  115.57,25.91 0 top
LOGO19  QWIIC_LOGO_5MM  [QWIIC_5MM]  113.41,14.73 0 top
LOGO20  SFE_LOGO_NAME_FLAME.1_INCH  [SFE_LOGO_NAME_FLAME_.1]  123.19,28.45 0 bottom
LOGO21  OSHW-LOGOS  [OSHW-LOGO-S]  138.94,24.64 0 bottom
LOGO22  SFE_LOGO_FLAME.2_INCH  [SFE_LOGO_FLAME_.2]  141.48,25.91 0 top
LOGO23  QWIIC_LOGO_5MM  [QWIIC_5MM]  139.32,14.73 0 top
LOGO24  SFE_LOGO_NAME_FLAME.1_INCH  [SFE_LOGO_NAME_FLAME_.1]  149.1,28.45 0 bottom
LOGO25  OSHW-LOGOS  [OSHW-LOGO-S]  9.4,50.55 0 bottom
LOGO26  SFE_LOGO_FLAME.2_INCH  [SFE_LOGO_FLAME_.2]  11.94,51.82 0 top
LOGO27  QWIIC_LOGO_5MM  [QWIIC_5MM]  9.78,40.64 0 top
LOGO28  SFE_LOGO_NAME_FLAME.1_INCH  [SFE_LOGO_NAME_FLAME_.1]  19.56,54.36 0 bottom
LOGO29  OSHW-LOGOS  [OSHW-LOGO-S]  35.31,50.55 0 bottom
LOGO30  SFE_LOGO_FLAME.2_INCH  [SFE_LOGO_FLAME_.2]  37.85,51.82 0 top
LOGO31  QWIIC_LOGO_5MM  [QWIIC_5MM]  35.69,40.64 0 top
LOGO32  SFE_LOGO_NAME_FLAME.1_INCH  [SFE_LOGO_NAME_FLAME_.1]  45.47,54.36 0 bottom
LOGO33  OSHW-LOGOS  [OSHW-LOGO-S]  61.21,50.55 0 bottom
LOGO34  SFE_LOGO_FLAME.2_INCH  [SFE_LOGO_FLAME_.2]  63.75,51.82 0 top
LOGO35  QWIIC_LOGO_5MM  [QWIIC_5MM]  61.59,40.64 0 top
LOGO36  SFE_LOGO_NAME_FLAME.1_INCH  [SFE_LOGO_NAME_FLAME_.1]  71.37,54.36 0 bottom
LOGO37  OSHW-LOGOS  [OSHW-LOGO-S]  87.12,50.55 0 bottom
LOGO38  SFE_LOGO_FLAME.2_INCH  [SFE_LOGO_FLAME_.2]  89.66,51.82 0 top
LOGO39  QWIIC_LOGO_5MM  [QWIIC_5MM]  87.5,40.64 0 top
LOGO40  SFE_LOGO_NAME_FLAME.1_INCH  [SFE_LOGO_NAME_FLAME_.1]  97.28,54.36 0 bottom
LOGO41  OSHW-LOGOS  [OSHW-LOGO-S]  113.03,50.55 0 bottom
LOGO42  SFE_LOGO_FLAME.2_INCH  [SFE_LOGO_FLAME_.2]  115.57,51.82 0 top
LOGO43  QWIIC_LOGO_5MM  [QWIIC_5MM]  113.41,40.64 0 top
LOGO44  SFE_LOGO_NAME_FLAME.1_INCH  [SFE_LOGO_NAME_FLAME_.1]  123.19,54.36 0 bottom
LOGO45  OSHW-LOGOS  [OSHW-LOGO-S]  138.94,50.55 0 bottom
LOGO46  SFE_LOGO_FLAME.2_INCH  [SFE_LOGO_FLAME_.2]  141.48,51.82 0 top
LOGO47  QWIIC_LOGO_5MM  [QWIIC_5MM]  139.32,40.64 0 top
LOGO48  SFE_LOGO_NAME_FLAME.1_INCH  [SFE_LOGO_NAME_FLAME_.1]  149.1,54.36 0 bottom
LOGO49  OSHW-LOGOS  [OSHW-LOGO-S]  9.4,76.45 0 bottom
LOGO50  SFE_LOGO_FLAME.2_INCH  [SFE_LOGO_FLAME_.2]  11.94,77.72 0 top
LOGO51  QWIIC_LOGO_5MM  [QWIIC_5MM]  9.78,66.55 0 top
LOGO52  SFE_LOGO_NAME_FLAME.1_INCH  [SFE_LOGO_NAME_FLAME_.1]  19.56,80.26 0 bottom
LOGO53  OSHW-LOGOS  [OSHW-LOGO-S]  35.31,76.45 0 bottom
LOGO54  SFE_LOGO_FLAME.2_INCH  [SFE_LOGO_FLAME_.2]  37.85,77.72 0 top
LOGO55  QWIIC_LOGO_5MM  [QWIIC_5MM]  35.69,66.55 0 top
LOGO56  SFE_LOGO_NAME_FLAME.1_INCH  [SFE_LOGO_NAME_FLAME_.1]  45.47,80.26 0 bottom
LOGO57  OSHW-LOGOS  [OSHW-LOGO-S]  61.21,76.45 0 bottom
LOGO58  SFE_LOGO_FLAME.2_INCH  [SFE_LOGO_FLAME_.2]  63.75,77.72 0 top
LOGO59  QWIIC_LOGO_5MM  [QWIIC_5MM]  61.59,66.55 0 top
LOGO60  SFE_LOGO_NAME_FLAME.1_INCH  [SFE_LOGO_NAME_FLAME_.1]  71.37,80.26 0 bottom
LOGO61  OSHW-LOGOS  [OSHW-LOGO-S]  87.12,76.45 0 bottom
LOGO62  SFE_LOGO_FLAME.2_INCH  [SFE_LOGO_FLAME_.2]  89.66,77.72 0 top
LOGO63  QWIIC_LOGO_5MM  [QWIIC_5MM]  87.5,66.55 0 top
LOGO64  SFE_LOGO_NAME_FLAME.1_INCH  [SFE_LOGO_NAME_FLAME_.1]  97.28,80.26 0 bottom
LOGO65  OSHW-LOGOS  [OSHW-LOGO-S]  113.03,76.45 0 bottom
LOGO66  SFE_LOGO_FLAME.2_INCH  [SFE_LOGO_FLAME_.2]  115.57,77.72 0 top
LOGO67  QWIIC_LOGO_5MM  [QWIIC_5MM]  113.41,66.55 0 top
LOGO68  SFE_LOGO_NAME_FLAME.1_INCH  [SFE_LOGO_NAME_FLAME_.1]  123.19,80.26 0 bottom
LOGO69  OSHW-LOGOS  [OSHW-LOGO-S]  138.94,76.45 0 bottom
LOGO70  SFE_LOGO_FLAME.2_INCH  [SFE_LOGO_FLAME_.2]  141.48,77.72 0 top
LOGO71  QWIIC_LOGO_5MM  [QWIIC_5MM]  139.32,66.55 0 top
LOGO72  SFE_LOGO_NAME_FLAME.1_INCH  [SFE_LOGO_NAME_FLAME_.1]  149.1,80.26 0 bottom
LOGO73  OSHW-LOGOS  [OSHW-LOGO-S]  9.4,102.36 0 bottom
LOGO74  SFE_LOGO_FLAME.2_INCH  [SFE_LOGO_FLAME_.2]  11.94,103.63 0 top
LOGO75  QWIIC_LOGO_5MM  [QWIIC_5MM]  9.78,92.46 0 top
LOGO76  SFE_LOGO_NAME_FLAME.1_INCH  [SFE_LOGO_NAME_FLAME_.1]  19.56,106.17 0 bottom
LOGO77  OSHW-LOGOS  [OSHW-LOGO-S]  35.31,102.36 0 bottom
LOGO78  SFE_LOGO_FLAME.2_INCH  [SFE_LOGO_FLAME_.2]  37.85,103.63 0 top
LOGO79  QWIIC_LOGO_5MM  [QWIIC_5MM]  35.69,92.46 0 top
LOGO80  SFE_LOGO_NAME_FLAME.1_INCH  [SFE_LOGO_NAME_FLAME_.1]  45.47,106.17 0 bottom
LOGO81  OSHW-LOGOS  [OSHW-LOGO-S]  61.21,102.36 0 bottom
LOGO82  SFE_LOGO_FLAME.2_INCH  [SFE_LOGO_FLAME_.2]  63.75,103.63 0 top
LOGO83  QWIIC_LOGO_5MM  [QWIIC_5MM]  61.59,92.46 0 top
LOGO84  SFE_LOGO_NAME_FLAME.1_INCH  [SFE_LOGO_NAME_FLAME_.1]  71.37,106.17 0 bottom
LOGO85  OSHW-LOGOS  [OSHW-LOGO-S]  87.12,102.36 0 bottom
LOGO86  SFE_LOGO_FLAME.2_INCH  [SFE_LOGO_FLAME_.2]  89.66,103.63 0 top
LOGO87  QWIIC_LOGO_5MM  [QWIIC_5MM]  87.5,92.46 0 top
LOGO88  SFE_LOGO_NAME_FLAME.1_INCH  [SFE_LOGO_NAME_FLAME_.1]  97.28,106.17 0 bottom
LOGO89  OSHW-LOGOS  [OSHW-LOGO-S]  113.03,102.36 0 bottom
LOGO90  SFE_LOGO_FLAME.2_INCH  [SFE_LOGO_FLAME_.2]  115.57,103.63 0 top
LOGO91  QWIIC_LOGO_5MM  [QWIIC_5MM]  113.41,92.46 0 top
LOGO92  SFE_LOGO_NAME_FLAME.1_INCH  [SFE_LOGO_NAME_FLAME_.1]  123.19,106.17 0 bottom
LOGO93  OSHW-LOGOS  [OSHW-LOGO-S]  138.94,102.36 0 bottom
LOGO94  SFE_LOGO_FLAME.2_INCH  [SFE_LOGO_FLAME_.2]  141.48,103.63 0 top
LOGO95  QWIIC_LOGO_5MM  [QWIIC_5MM]  139.32,92.46 0 top
LOGO96  SFE_LOGO_NAME_FLAME.1_INCH  [SFE_LOGO_NAME_FLAME_.1]  149.1,106.17 0 bottom
R1  2.2k  [0603]  18.29,14.35 90 top
R2  2.2k  [0603]  20.83,14.35 270 top
R3  10k  [0603]  17.65,24 270 top
R4  10k  [0603]  21.46,24 90 top
R5  1k  [0603]  29.46,24 0 top
R6  10k  [0603]  28.45,14.48 90 top
R7  2.2k  [0603]  44.2,14.35 90 top
R8  2.2k  [0603]  46.74,14.35 270 top
R9  10k  [0603]  43.56,24 270 top
R10  10k  [0603]  47.37,24 90 top
R11  1k  [0603]  55.37,24 0 top
R12  10k  [0603]  54.36,14.48 90 top
R13  2.2k  [0603]  70.1,14.35 90 top
R14  2.2k  [0603]  72.64,14.35 270 top
R15  10k  [0603]  69.47,24 270 top
R16  10k  [0603]  73.28,24 90 top
R17  1k  [0603]  81.28,24 0 top
R18  10k  [0603]  80.26,14.48 90 top
R19  2.2k  [0603]  96.01,14.35 90 top
R20  2.2k  [0603]  98.55,14.35 270 top
R21  10k  [0603]  95.38,24 270 top
R22  10k  [0603]  99.19,24 90 top
R23  1k  [0603]  107.19,24 0 top
R24  10k  [0603]  106.17,14.48 90 top
R25  2.2k  [0603]  121.92,14.35 90 top
R26  2.2k  [0603]  124.46,14.35 270 top
R27  10k  [0603]  121.29,24 270 top
R28  10k  [0603]  125.09,24 90 top
R29  1k  [0603]  133.1,24 0 top
R30  10k  [0603]  132.08,14.48 90 top
R31  2.2k  [0603]  147.83,14.35 90 top
R32  2.2k  [0603]  150.37,14.35 270 top
R33  10k  [0603]  147.19,24 270 top
R34  10k  [0603]  151,24 90 top
R35  1k  [0603]  159,24 0 top
R36  10k  [0603]  157.99,14.48 90 top
R37  2.2k  [0603]  18.29,40.26 90 top
R38  2.2k  [0603]  20.83,40.26 270 top
R39  10k  [0603]  17.65,49.91 270 top
R40  10k  [0603]  21.46,49.91 90 top
R41  1k  [0603]  29.46,49.91 0 top
R42  10k  [0603]  28.45,40.39 90 top
R43  2.2k  [0603]  44.2,40.26 90 top
R44  2.2k  [0603]  46.74,40.26 270 top
R45  10k  [0603]  43.56,49.91 270 top
R46  10k  [0603]  47.37,49.91 90 top
R47  1k  [0603]  55.37,49.91 0 top
R48  10k  [0603]  54.36,40.39 90 top
R49  2.2k  [0603]  70.1,40.26 90 top
R50  2.2k  [0603]  72.64,40.26 270 top
R51  10k  [0603]  69.47,49.91 270 top
R52  10k  [0603]  73.28,49.91 90 top
R53  1k  [0603]  81.28,49.91 0 top
R54  10k  [0603]  80.26,40.39 90 top
R55  2.2k  [0603]  96.01,40.26 90 top
R56  2.2k  [0603]  98.55,40.26 270 top
R57  10k  [0603]  95.38,49.91 270 top
R58  10k  [0603]  99.19,49.91 90 top
R59  1k  [0603]  107.19,49.91 0 top
R60  10k  [0603]  106.17,40.39 90 top
R61  2.2k  [0603]  121.92,40.26 90 top
R62  2.2k  [0603]  124.46,40.26 270 top
R63  10k  [0603]  121.29,49.91 270 top
R64  10k  [0603]  125.09,49.91 90 top
R65  1k  [0603]  133.1,49.91 0 top
R66  10k  [0603]  132.08,40.39 90 top
R67  2.2k  [0603]  147.83,40.26 90 top
R68  2.2k  [0603]  150.37,40.26 270 top
R69  10k  [0603]  147.19,49.91 270 top
R70  10k  [0603]  151,49.91 90 top
R71  1k  [0603]  159,49.91 0 top
R72  10k  [0603]  157.99,40.39 90 top
R73  2.2k  [0603]  18.29,66.17 90 top
R74  2.2k  [0603]  20.83,66.17 270 top
R75  10k  [0603]  17.65,75.82 270 top
R76  10k  [0603]  21.46,75.82 90 top
R77  1k  [0603]  29.46,75.82 0 top
R78  10k  [0603]  28.45,66.29 90 top
R79  2.2k  [0603]  44.2,66.17 90 top
R80  2.2k  [0603]  46.74,66.17 270 top
R81  10k  [0603]  43.56,75.82 270 top
R82  10k  [0603]  47.37,75.82 90 top
R83  1k  [0603]  55.37,75.82 0 top
R84  10k  [0603]  54.36,66.29 90 top
R85  2.2k  [0603]  70.1,66.17 90 top
R86  2.2k  [0603]  72.64,66.17 270 top
R87  10k  [0603]  69.47,75.82 270 top
R88  10k  [0603]  73.28,75.82 90 top
R89  1k  [0603]  81.28,75.82 0 top
R90  10k  [0603]  80.26,66.29 90 top
R91  2.2k  [0603]  96.01,66.17 90 top
R92  2.2k  [0603]  98.55,66.17 270 top
R93  10k  [0603]  95.38,75.82 270 top
R94  10k  [0603]  99.19,75.82 90 top
R95  1k  [0603]  107.19,75.82 0 top
R96  10k  [0603]  106.17,66.29 90 top
R97  2.2k  [0603]  121.92,66.17 90 top
R98  2.2k  [0603]  124.46,66.17 270 top
R99  10k  [0603]  121.29,75.82 270 top
R100  10k  [0603]  125.09,75.82 90 top
R101  1k  [0603]  133.1,75.82 0 top
R102  10k  [0603]  132.08,66.29 90 top
R103  2.2k  [0603]  147.83,66.17 90 top
R104  2.2k  [0603]  150.37,66.17 270 top
R105  10k  [0603]  147.19,75.82 270 top
R106  10k  [0603]  151,75.82 90 top
R107  1k  [0603]  159,75.82 0 top
R108  10k  [0603]  157.99,66.29 90 top
R109  2.2k  [0603]  18.29,92.08 90 top
R110  2.2k  [0603]  20.83,92.08 270 top
R111  10k  [0603]  17.65,101.73 270 top
R112  10k  [0603]  21.46,101.73 90 top
R113  1k  [0603]  29.46,101.73 0 top
R114  10k  [0603]  28.45,92.2 90 top
R115  2.2k  [0603]  44.2,92.08 90 top
R116  2.2k  [0603]  46.74,92.08 270 top
R117  10k  [0603]  43.56,101.73 270 top
R118  10k  [0603]  47.37,101.73 90 top
R119  1k  [0603]  55.37,101.73 0 top
R120  10k  [0603]  54.36,92.2 90 top
R121  2.2k  [0603]  70.1,92.08 90 top
R122  2.2k  [0603]  72.64,92.08 270 top
R123  10k  [0603]  69.47,101.73 270 top
R124  10k  [0603]  73.28,101.73 90 top
R125  1k  [0603]  81.28,101.73 0 top
R126  10k  [0603]  80.26,92.2 90 top
R127  2.2k  [0603]  96.01,92.08 90 top
R128  2.2k  [0603]  98.55,92.08 270 top
R129  10k  [0603]  95.38,101.73 270 top
R130  10k  [0603]  99.19,101.73 90 top
R131  1k  [0603]  107.19,101.73 0 top
R132  10k  [0603]  106.17,92.2 90 top
R133  2.2k  [0603]  121.92,92.08 90 top
R134  2.2k  [0603]  124.46,92.08 270 top
R135  10k  [0603]  121.29,101.73 270 top
R136  10k  [0603]  125.09,101.73 90 top
R137  1k  [0603]  133.1,101.73 0 top
R138  10k  [0603]  132.08,92.2 90 top
R139  2.2k  [0603]  147.83,92.08 90 top
R140  2.2k  [0603]  150.37,92.08 270 top
R141  10k  [0603]  147.19,101.73 270 top
R142  10k  [0603]  151,101.73 90 top
R143  1k  [0603]  159,101.73 0 top
R144  10k  [0603]  157.99,92.2 90 top
U1  BMP581  [BMP581]  19.56,19.56 90 top
U2  BMP581  [BMP581]  45.47,19.56 90 top
U3  BMP581  [BMP581]  71.37,19.56 90 top
U4  BMP581  [BMP581]  97.28,19.56 90 top
U5  BMP581  [BMP581]  123.19,19.56 90 top
U6  BMP581  [BMP581]  149.1,19.56 90 top
U7  BMP581  [BMP581]  19.56,45.47 90 top
U8  BMP581  [BMP581]  45.47,45.47 90 top
U9  BMP581  [BMP581]  71.37,45.47 90 top
U10  BMP581  [BMP581]  97.28,45.47 90 top
U11  BMP581  [BMP581]  123.19,45.47 90 top
U12  BMP581  [BMP581]  149.1,45.47 90 top
U13  BMP581  [BMP581]  19.56,71.37 90 top
U14  BMP581  [BMP581]  45.47,71.37 90 top
U15  BMP581  [BMP581]  71.37,71.37 90 top
U16  BMP581  [BMP581]  97.28,71.37 90 top
U17  BMP581  [BMP581]  123.19,71.37 90 top
U18  BMP581  [BMP581]  149.1,71.37 90 top
U19  BMP581  [BMP581]  19.56,97.28 90 top
U20  BMP581  [BMP581]  45.47,97.28 90 top
U21  BMP581  [BMP581]  71.37,97.28 90 top
U22  BMP581  [BMP581]  97.28,97.28 90 top
U23  BMP581  [BMP581]  123.19,97.28 90 top
U24  BMP581  [BMP581]  149.1,97.28 90 top
U$1  [BMP5810]  19.56,27.18 0 top
U$2  [#GND#0]  11.94,8.64 90 top
U$3  [#GND#0]  11.94,8.64 90 bottom
U$4  [#3V3#0]  14.48,8.64 90 bottom
U$5  [#SDI#SDA#0]  17.02,8.64 90 top
U$6  [#SDI#SDA#0]  17.02,8.64 90 bottom
U$7  [#SCK#SCL#0]  19.56,8.64 90 top
U$8  [#SCK#SCL#0]  19.56,8.64 90 bottom
U$9  [#SDO#ADR#0]  22.1,8.64 90 top
U$10  [#SDO#ADR#0]  22.1,8.64 90 bottom
U$11  [#I2C#0]  19.56,19.3 0 bottom
U$12  [#0X46#0]  20.95,22.73 0 bottom
U$13  [#INT#0]  27.18,8.64 90 top
U$14  [#INT#0]  27.18,8.64 90 bottom
U$15  [#0X47#0]  18.16,22.73 0 bottom
U$16  [PWR0]  29.72,27.18 0 top
U$17  [#ADR#0]  19.56,24.38 0 bottom
U$18  [##CSB##1]  26.8,13.97 0 bottom
U$19  [#LED#0]  27.81,20.45 0 bottom
U$20  [#3V3#0]  14.48,8.64 90 top
U$21  [PRESSURE0]  19.56,30.99 0 top
U$22  [BMP5810]  19.56,26.04 0 bottom
U$23  [PRESSURE0]  45.47,30.99 0 top
U$24  [SENSOR0]  45.47,29.08 0 top
U$25  [##CSB##0]  24.64,8.64 90 top
U$26  [SENSOR0]  19.56,29.08 0 top
U$27  [BMP5810]  45.47,27.18 0 top
U$28  [##CSB##0]  24.64,8.64 90 bottom
U$29  [#GND#0]  37.85,8.64 90 top
U$30  [#GND#0]  37.85,8.64 90 bottom
U$31  [#SDI#SDA#0]  42.93,8.64 90 top
U$32  [#SDI#SDA#0]  42.93,8.64 90 bottom
U$33  [#SCK#SCL#0]  45.47,8.64 90 top
U$34  [#SCK#SCL#0]  45.47,8.64 90 bottom
U$35  [#SDO#ADR#0]  48.01,8.64 90 top
U$36  [#SDO#ADR#0]  48.01,8.64 90 bottom
U$37  [#INT#0]  53.09,8.64 90 top
U$38  [#INT#0]  53.09,8.64 90 bottom
U$39  [#3V3#0]  40.39,8.64 90 top
U$40  [#3V3#0]  40.39,8.64 90 bottom
U$41  [##CSB##0]  50.55,8.64 90 top
U$42  [##CSB##0]  50.55,8.64 90 bottom
U$43  [#ADR#0]  45.47,24.38 0 bottom
U$44  [#LED#0]  53.72,20.45 0 bottom
U$45  [#I2C#0]  45.47,19.3 0 bottom
U$46  [#0X46#0]  46.86,22.73 0 bottom
U$47  [#0X47#0]  44.07,22.73 0 bottom
U$48  [PWR0]  55.63,27.18 0 top
U$49  [##CSB##1]  52.7,13.97 0 bottom
U$50  [BMP5810]  45.47,26.04 0 bottom
U$51  [PRESSURE0]  71.37,30.99 0 top
U$52  [SENSOR0]  71.37,29.08 0 top
U$53  [BMP5810]  71.37,27.18 0 top
U$54  [#GND#0]  63.75,8.64 90 top
U$55  [#GND#0]  63.75,8.64 90 bottom
U$56  [#SDI#SDA#0]  68.83,8.64 90 top
U$57  [#SDI#SDA#0]  68.83,8.64 90 bottom
U$58  [#SCK#SCL#0]  71.37,8.64 90 top
U$59  [#SCK#SCL#0]  71.37,8.64 90 bottom
U$60  [#SDO#ADR#0]  73.91,8.64 90 top
U$61  [#SDO#ADR#0]  73.91,8.64 90 bottom
U$62  [#INT#0]  78.99,8.64 90 top
U$63  [#INT#0]  78.99,8.64 90 bottom
U$64  [#3V3#0]  66.29,8.64 90 top
U$65  [#3V3#0]  66.29,8.64 90 bottom
U$66  [##CSB##0]  76.45,8.64 90 top
U$67  [##CSB##0]  76.45,8.64 90 bottom
U$68  [#ADR#0]  71.37,24.38 0 bottom
U$69  [#LED#0]  79.63,20.45 0 bottom
U$70  [#I2C#0]  71.37,19.3 0 bottom
U$71  [#0X46#0]  72.77,22.73 0 bottom
U$72  [#0X47#0]  69.98,22.73 0 bottom
U$73  [PWR0]  81.53,27.18 0 top
U$74  [##CSB##1]  78.61,13.97 0 bottom
U$75  [BMP5810]  71.37,26.04 0 bottom
U$76  [PRESSURE0]  97.28,30.99 0 top
U$77  [SENSOR0]  97.28,29.08 0 top
U$78  [BMP5810]  97.28,27.18 0 top
U$79  [#GND#0]  89.66,8.64 90 top
U$80  [#GND#0]  89.66,8.64 90 bottom
U$81  [#SDI#SDA#0]  94.74,8.64 90 top
U$82  [#SDI#SDA#0]  94.74,8.64 90 bottom
U$83  [#SCK#SCL#0]  97.28,8.64 90 top
U$84  [#SCK#SCL#0]  97.28,8.64 90 bottom
U$85  [#SDO#ADR#0]  99.82,8.64 90 top
U$86  [#SDO#ADR#0]  99.82,8.64 90 bottom
U$87  [#INT#0]  104.9,8.64 90 top
U$88  [#INT#0]  104.9,8.64 90 bottom
U$89  [#3V3#0]  92.2,8.64 90 top
U$90  [#3V3#0]  92.2,8.64 90 bottom
U$91  [##CSB##0]  102.36,8.64 90 top
U$92  [##CSB##0]  102.36,8.64 90 bottom
U$93  [#ADR#0]  97.28,24.38 0 bottom
U$94  [#LED#0]  105.54,20.45 0 bottom
U$95  [#I2C#0]  97.28,19.3 0 bottom
U$96  [#0X46#0]  98.68,22.73 0 bottom
U$97  [#0X47#0]  95.89,22.73 0 bottom
U$98  [PWR0]  107.44,27.18 0 top
U$99  [##CSB##1]  104.52,13.97 0 bottom
U$100  [BMP5810]  97.28,26.04 0 bottom
U$101  [PRESSURE0]  123.19,30.99 0 top
U$102  [SENSOR0]  123.19,29.08 0 top
U$103  [BMP5810]  123.19,27.18 0 top
U$104  [#GND#0]  115.57,8.64 90 top
U$105  [#GND#0]  115.57,8.64 90 bottom
U$106  [#SDI#SDA#0]  120.65,8.64 90 top
U$107  [#SDI#SDA#0]  120.65,8.64 90 bottom
U$108  [#SCK#SCL#0]  123.19,8.64 90 top
U$109  [#SCK#SCL#0]  123.19,8.64 90 bottom
U$110  [#SDO#ADR#0]  125.73,8.64 90 top
U$111  [#SDO#ADR#0]  125.73,8.64 90 bottom
U$112  [#INT#0]  130.81,8.64 90 top
U$113  [#INT#0]  130.81,8.64 90 bottom
U$114  [#3V3#0]  118.11,8.64 90 top
U$115  [#3V3#0]  118.11,8.64 90 bottom
U$116  [##CSB##0]  128.27,8.64 90 top
U$117  [##CSB##0]  128.27,8.64 90 bottom
U$118  [#ADR#0]  123.19,24.38 0 bottom
U$119  [#LED#0]  131.44,20.45 0 bottom
U$120  [#I2C#0]  123.19,19.3 0 bottom
U$121  [#0X46#0]  124.59,22.73 0 bottom
U$122  [#0X47#0]  121.79,22.73 0 bottom
U$123  [PWR0]  133.35,27.18 0 top
U$124  [##CSB##1]  130.43,13.97 0 bottom
U$125  [BMP5810]  123.19,26.04 0 bottom
U$126  [PRESSURE0]  149.1,30.99 0 top
U$127  [SENSOR0]  149.1,29.08 0 top
U$128  [BMP5810]  149.1,27.18 0 top
U$129  [#GND#0]  141.48,8.64 90 top
U$130  [#GND#0]  141.48,8.64 90 bottom
U$131  [#SDI#SDA#0]  146.56,8.64 90 top
U$132  [#SDI#SDA#0]  146.56,8.64 90 bottom
U$133  [#SCK#SCL#0]  149.1,8.64 90 top
U$134  [#SCK#SCL#0]  149.1,8.64 90 bottom
U$135  [#SDO#ADR#0]  151.64,8.64 90 top
U$136  [#SDO#ADR#0]  151.64,8.64 90 bottom
U$137  [#INT#0]  156.72,8.64 90 top
U$138  [#INT#0]  156.72,8.64 90 bottom
U$139  [#3V3#0]  144.02,8.64 90 top
U$140  [#3V3#0]  144.02,8.64 90 bottom
U$141  [##CSB##0]  154.18,8.64 90 top
U$142  [##CSB##0]  154.18,8.64 90 bottom
U$143  [#ADR#0]  149.1,24.38 0 bottom
U$144  [#LED#0]  157.35,20.45 0 bottom
U$145  [#I2C#0]  149.1,19.3 0 bottom
U$146  [#0X46#0]  150.5,22.73 0 bottom
U$147  [#0X47#0]  147.7,22.73 0 bottom
U$148  [PWR0]  159.26,27.18 0 top
U$149  [##CSB##1]  156.34,13.97 0 bottom
U$150  [BMP5810]  149.1,26.04 0 bottom
U$151  [PRESSURE0]  19.56,56.9 0 top
U$152  [SENSOR0]  19.56,54.99 0 top
U$153  [BMP5810]  19.56,53.09 0 top
U$154  [#GND#0]  11.94,34.54 90 top
U$155  [#GND#0]  11.94,34.54 90 bottom
U$156  [#SDI#SDA#0]  17.02,34.54 90 top
U$157  [#SDI#SDA#0]  17.02,34.54 90 bottom
U$158  [#SCK#SCL#0]  19.56,34.54 90 top
U$159  [#SCK#SCL#0]  19.56,34.54 90 bottom
U$160  [#SDO#ADR#0]  22.1,34.54 90 top
U$161  [#SDO#ADR#0]  22.1,34.54 90 bottom
U$162  [#INT#0]  27.18,34.54 90 top
U$163  [#INT#0]  27.18,34.54 90 bottom
U$164  [#3V3#0]  14.48,34.54 90 top
U$165  [#3V3#0]  14.48,34.54 90 bottom
U$166  [##CSB##0]  24.64,34.54 90 top
U$167  [##CSB##0]  24.64,34.54 90 bottom
U$168  [#ADR#0]  19.56,50.29 0 bottom
U$169  [#LED#0]  27.81,46.35 0 bottom
U$170  [#I2C#0]  19.56,45.21 0 bottom
U$171  [#0X46#0]  20.95,48.64 0 bottom
U$172  [#0X47#0]  18.16,48.64 0 bottom
U$173  [PWR0]  29.72,53.09 0 top
U$174  [##CSB##1]  26.8,39.88 0 bottom
U$175  [BMP5810]  19.56,51.94 0 bottom
U$176  [PRESSURE0]  45.47,56.9 0 top
U$177  [SENSOR0]  45.47,54.99 0 top
U$178  [BMP5810]  45.47,53.09 0 top
U$179  [#GND#0]  37.85,34.54 90 top
U$180  [#GND#0]  37.85,34.54 90 bottom
U$181  [#SDI#SDA#0]  42.93,34.54 90 top
U$182  [#SDI#SDA#0]  42.93,34.54 90 bottom
U$183  [#SCK#SCL#0]  45.47,34.54 90 top
U$184  [#SCK#SCL#0]  45.47,34.54 90 bottom
U$185  [#SDO#ADR#0]  48.01,34.54 90 top
U$186  [#SDO#ADR#0]  48.01,34.54 90 bottom
U$187  [#INT#0]  53.09,34.54 90 top
U$188  [#INT#0]  53.09,34.54 90 bottom
U$189  [#3V3#0]  40.39,34.54 90 top
U$190  [#3V3#0]  40.39,34.54 90 bottom
U$191  [##CSB##0]  50.55,34.54 90 top
U$192  [##CSB##0]  50.55,34.54 90 bottom
U$193  [#ADR#0]  45.47,50.29 0 bottom
U$194  [#LED#0]  53.72,46.35 0 bottom
U$195  [#I2C#0]  45.47,45.21 0 bottom
U$196  [#0X46#0]  46.86,48.64 0 bottom
U$197  [#0X47#0]  44.07,48.64 0 bottom
U$198  [PWR0]  55.63,53.09 0 top
U$199  [##CSB##1]  52.7,39.88 0 bottom
U$200  [BMP5810]  45.47,51.94 0 bottom
U$201  [PRESSURE0]  71.37,56.9 0 top
U$202  [SENSOR0]  71.37,54.99 0 top
U$203  [BMP5810]  71.37,53.09 0 top
U$204  [#GND#0]  63.75,34.54 90 top
U$205  [#GND#0]  63.75,34.54 90 bottom
U$206  [#SDI#SDA#0]  68.83,34.54 90 top
U$207  [#SDI#SDA#0]  68.83,34.54 90 bottom
U$208  [#SCK#SCL#0]  71.37,34.54 90 top
U$209  [#SCK#SCL#0]  71.37,34.54 90 bottom
U$210  [#SDO#ADR#0]  73.91,34.54 90 top
U$211  [#SDO#ADR#0]  73.91,34.54 90 bottom
U$212  [#INT#0]  78.99,34.54 90 top
U$213  [#INT#0]  78.99,34.54 90 bottom
U$214  [#3V3#0]  66.29,34.54 90 top
U$215  [#3V3#0]  66.29,34.54 90 bottom
U$216  [##CSB##0]  76.45,34.54 90 top
U$217  [##CSB##0]  76.45,34.54 90 bottom
U$218  [#ADR#0]  71.37,50.29 0 bottom
U$219  [#LED#0]  79.63,46.35 0 bottom
U$220  [#I2C#0]  71.37,45.21 0 bottom
U$221  [#0X46#0]  72.77,48.64 0 bottom
U$222  [#0X47#0]  69.98,48.64 0 bottom
U$223  [PWR0]  81.53,53.09 0 top
U$224  [##CSB##1]  78.61,39.88 0 bottom
U$225  [BMP5810]  71.37,51.94 0 bottom
U$226  [PRESSURE0]  97.28,56.9 0 top
U$227  [SENSOR0]  97.28,54.99 0 top
U$228  [BMP5810]  97.28,53.09 0 top
U$229  [#GND#0]  89.66,34.54 90 top
U$230  [#GND#0]  89.66,34.54 90 bottom
U$231  [#SDI#SDA#0]  94.74,34.54 90 top
U$232  [#SDI#SDA#0]  94.74,34.54 90 bottom
U$233  [#SCK#SCL#0]  97.28,34.54 90 top
U$234  [#SCK#SCL#0]  97.28,34.54 90 bottom
U$235  [#SDO#ADR#0]  99.82,34.54 90 top
U$236  [#SDO#ADR#0]  99.82,34.54 90 bottom
U$237  [#INT#0]  104.9,34.54 90 top
U$238  [#INT#0]  104.9,34.54 90 bottom
U$239  [#3V3#0]  92.2,34.54 90 top
U$240  [#3V3#0]  92.2,34.54 90 bottom
U$241  [##CSB##0]  102.36,34.54 90 top
U$242  [##CSB##0]  102.36,34.54 90 bottom
U$243  [#ADR#0]  97.28,50.29 0 bottom
U$244  [#LED#0]  105.54,46.35 0 bottom
U$245  [#I2C#0]  97.28,45.21 0 bottom
U$246  [#0X46#0]  98.68,48.64 0 bottom
U$247  [#0X47#0]  95.89,48.64 0 bottom
U$248  [PWR0]  107.44,53.09 0 top
U$249  [##CSB##1]  104.52,39.88 0 bottom
U$250  [BMP5810]  97.28,51.94 0 bottom
U$251  [PRESSURE0]  123.19,56.9 0 top
U$252  [SENSOR0]  123.19,54.99 0 top
U$253  [BMP5810]  123.19,53.09 0 top
U$254  [#GND#0]  115.57,34.54 90 top
U$255  [#GND#0]  115.57,34.54 90 bottom
U$256  [#SDI#SDA#0]  120.65,34.54 90 top
U$257  [#SDI#SDA#0]  120.65,34.54 90 bottom
U$258  [#SCK#SCL#0]  123.19,34.54 90 top
U$259  [#SCK#SCL#0]  123.19,34.54 90 bottom
U$260  [#SDO#ADR#0]  125.73,34.54 90 top
U$261  [#SDO#ADR#0]  125.73,34.54 90 bottom
U$262  [#INT#0]  130.81,34.54 90 top
U$263  [#INT#0]  130.81,34.54 90 bottom
U$264  [#3V3#0]  118.11,34.54 90 top
U$265  [#3V3#0]  118.11,34.54 90 bottom
U$266  [##CSB##0]  128.27,34.54 90 top
U$267  [##CSB##0]  128.27,34.54 90 bottom
U$268  [#ADR#0]  123.19,50.29 0 bottom
U$269  [#LED#0]  131.44,46.35 0 bottom
U$270  [#I2C#0]  123.19,45.21 0 bottom
U$271  [#0X46#0]  124.59,48.64 0 bottom
U$272  [#0X47#0]  121.79,48.64 0 bottom
U$273  [PWR0]  133.35,53.09 0 top
U$274  [##CSB##1]  130.43,39.88 0 bottom
U$275  [BMP5810]  123.19,51.94 0 bottom
U$276  [PRESSURE0]  149.1,56.9 0 top
U$277  [SENSOR0]  149.1,54.99 0 top
U$278  [BMP5810]  149.1,53.09 0 top
U$279  [#GND#0]  141.48,34.54 90 top
U$280  [#GND#0]  141.48,34.54 90 bottom
U$281  [#SDI#SDA#0]  146.56,34.54 90 top
U$282  [#SDI#SDA#0]  146.56,34.54 90 bottom
U$283  [#SCK#SCL#0]  149.1,34.54 90 top
U$284  [#SCK#SCL#0]  149.1,34.54 90 bottom
U$285  [#SDO#ADR#0]  151.64,34.54 90 top
U$286  [#SDO#ADR#0]  151.64,34.54 90 bottom
U$287  [#INT#0]  156.72,34.54 90 top
U$288  [#INT#0]  156.72,34.54 90 bottom
U$289  [#3V3#0]  144.02,34.54 90 top
U$290  [#3V3#0]  144.02,34.54 90 bottom
U$291  [##CSB##0]  154.18,34.54 90 top
U$292  [##CSB##0]  154.18,34.54 90 bottom
U$293  [#ADR#0]  149.1,50.29 0 bottom
U$294  [#LED#0]  157.35,46.35 0 bottom
U$295  [#I2C#0]  149.1,45.21 0 bottom
U$296  [#0X46#0]  150.5,48.64 0 bottom
U$297  [#0X47#0]  147.7,48.64 0 bottom
U$298  [PWR0]  159.26,53.09 0 top
U$299  [##CSB##1]  156.34,39.88 0 bottom
U$300  [BMP5810]  149.1,51.94 0 bottom
U$301  [PRESSURE0]  19.56,82.8 0 top
U$302  [SENSOR0]  19.56,80.9 0 top
U$303  [BMP5810]  19.56,78.99 0 top
U$304  [#GND#0]  11.94,60.45 90 top
U$305  [#GND#0]  11.94,60.45 90 bottom
U$306  [#SDI#SDA#0]  17.02,60.45 90 top
U$307  [#SDI#SDA#0]  17.02,60.45 90 bottom
U$308  [#SCK#SCL#0]  19.56,60.45 90 top
U$309  [#SCK#SCL#0]  19.56,60.45 90 bottom
U$310  [#SDO#ADR#0]  22.1,60.45 90 top
U$311  [#SDO#ADR#0]  22.1,60.45 90 bottom
U$312  [#INT#0]  27.18,60.45 90 top
U$313  [#INT#0]  27.18,60.45 90 bottom
U$314  [#3V3#0]  14.48,60.45 90 top
U$315  [#3V3#0]  14.48,60.45 90 bottom
U$316  [##CSB##0]  24.64,60.45 90 top
U$317  [##CSB##0]  24.64,60.45 90 bottom
U$318  [#ADR#0]  19.56,76.2 0 bottom
U$319  [#LED#0]  27.81,72.26 0 bottom
U$320  [#I2C#0]  19.56,71.12 0 bottom
U$321  [#0X46#0]  20.95,74.55 0 bottom
U$322  [#0X47#0]  18.16,74.55 0 bottom
U$323  [PWR0]  29.72,78.99 0 top
U$324  [##CSB##1]  26.8,65.79 0 bottom
U$325  [BMP5810]  19.56,77.85 0 bottom
U$326  [PRESSURE0]  45.47,82.8 0 top
U$327  [SENSOR0]  45.47,80.9 0 top
U$328  [BMP5810]  45.47,78.99 0 top
U$329  [#GND#0]  37.85,60.45 90 top
U$330  [#GND#0]  37.85,60.45 90 bottom
U$331  [#SDI#SDA#0]  42.93,60.45 90 top
U$332  [#SDI#SDA#0]  42.93,60.45 90 bottom
U$333  [#SCK#SCL#0]  45.47,60.45 90 top
U$334  [#SCK#SCL#0]  45.47,60.45 90 bottom
U$335  [#SDO#ADR#0]  48.01,60.45 90 top
U$336  [#SDO#ADR#0]  48.01,60.45 90 bottom
U$337  [#INT#0]  53.09,60.45 90 top
U$338  [#INT#0]  53.09,60.45 90 bottom
U$339  [#3V3#0]  40.39,60.45 90 top
U$340  [#3V3#0]  40.39,60.45 90 bottom
U$341  [##CSB##0]  50.55,60.45 90 top
U$342  [##CSB##0]  50.55,60.45 90 bottom
U$343  [#ADR#0]  45.47,76.2 0 bottom
U$344  [#LED#0]  53.72,72.26 0 bottom
U$345  [#I2C#0]  45.47,71.12 0 bottom
U$346  [#0X46#0]  46.86,74.55 0 bottom
U$347  [#0X47#0]  44.07,74.55 0 bottom
U$348  [PWR0]  55.63,78.99 0 top
U$349  [##CSB##1]  52.7,65.79 0 bottom
U$350  [BMP5810]  45.47,77.85 0 bottom
U$351  [PRESSURE0]  71.37,82.8 0 top
U$352  [SENSOR0]  71.37,80.9 0 top
U$353  [BMP5810]  71.37,78.99 0 top
U$354  [#GND#0]  63.75,60.45 90 top
U$355  [#GND#0]  63.75,60.45 90 bottom
U$356  [#SDI#SDA#0]  68.83,60.45 90 top
U$357  [#SDI#SDA#0]  68.83,60.45 90 bottom
U$358  [#SCK#SCL#0]  71.37,60.45 90 top
U$359  [#SCK#SCL#0]  71.37,60.45 90 bottom
U$360  [#SDO#ADR#0]  73.91,60.45 90 top
U$361  [#SDO#ADR#0]  73.91,60.45 90 bottom
U$362  [#INT#0]  78.99,60.45 90 top
U$363  [#INT#0]  78.99,60.45 90 bottom
U$364  [#3V3#0]  66.29,60.45 90 top
U$365  [#3V3#0]  66.29,60.45 90 bottom
U$366  [##CSB##0]  76.45,60.45 90 top
U$367  [##CSB##0]  76.45,60.45 90 bottom
U$368  [#ADR#0]  71.37,76.2 0 bottom
U$369  [#LED#0]  79.63,72.26 0 bottom
U$370  [#I2C#0]  71.37,71.12 0 bottom
U$371  [#0X46#0]  72.77,74.55 0 bottom
U$372  [#0X47#0]  69.98,74.55 0 bottom
U$373  [PWR0]  81.53,78.99 0 top
U$374  [##CSB##1]  78.61,65.79 0 bottom
U$375  [BMP5810]  71.37,77.85 0 bottom
U$376  [PRESSURE0]  97.28,82.8 0 top
U$377  [SENSOR0]  97.28,80.9 0 top
U$378  [BMP5810]  97.28,78.99 0 top
U$379  [#GND#0]  89.66,60.45 90 top
U$380  [#GND#0]  89.66,60.45 90 bottom
U$381  [#SDI#SDA#0]  94.74,60.45 90 top
U$382  [#SDI#SDA#0]  94.74,60.45 90 bottom
U$383  [#SCK#SCL#0]  97.28,60.45 90 top
U$384  [#SCK#SCL#0]  97.28,60.45 90 bottom
U$385  [#SDO#ADR#0]  99.82,60.45 90 top
U$386  [#SDO#ADR#0]  99.82,60.45 90 bottom
U$387  [#INT#0]  104.9,60.45 90 top
U$388  [#INT#0]  104.9,60.45 90 bottom
U$389  [#3V3#0]  92.2,60.45 90 top
U$390  [#3V3#0]  92.2,60.45 90 bottom
U$391  [##CSB##0]  102.36,60.45 90 top
U$392  [##CSB##0]  102.36,60.45 90 bottom
U$393  [#ADR#0]  97.28,76.2 0 bottom
U$394  [#LED#0]  105.54,72.26 0 bottom
U$395  [#I2C#0]  97.28,71.12 0 bottom
U$396  [#0X46#0]  98.68,74.55 0 bottom
U$397  [#0X47#0]  95.89,74.55 0 bottom
U$398  [PWR0]  107.44,78.99 0 top
U$399  [##CSB##1]  104.52,65.79 0 bottom